# EAGLE board quantum_AnalougeEngine_V5_2 (EAGLE 9.6.2), part 1 of 2
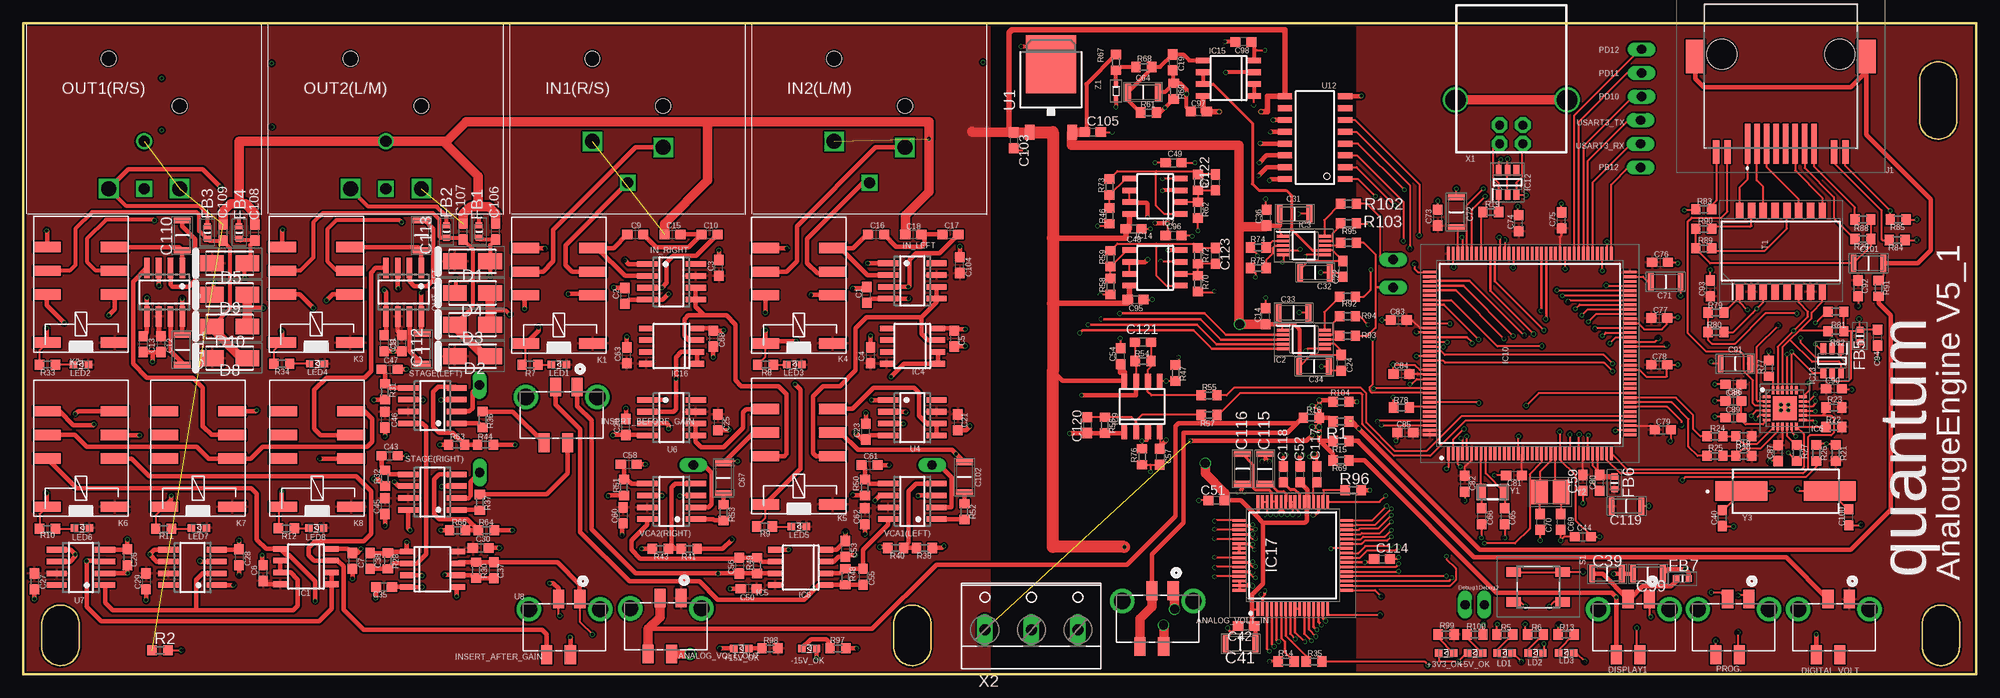
[diagram p0: board, top side]
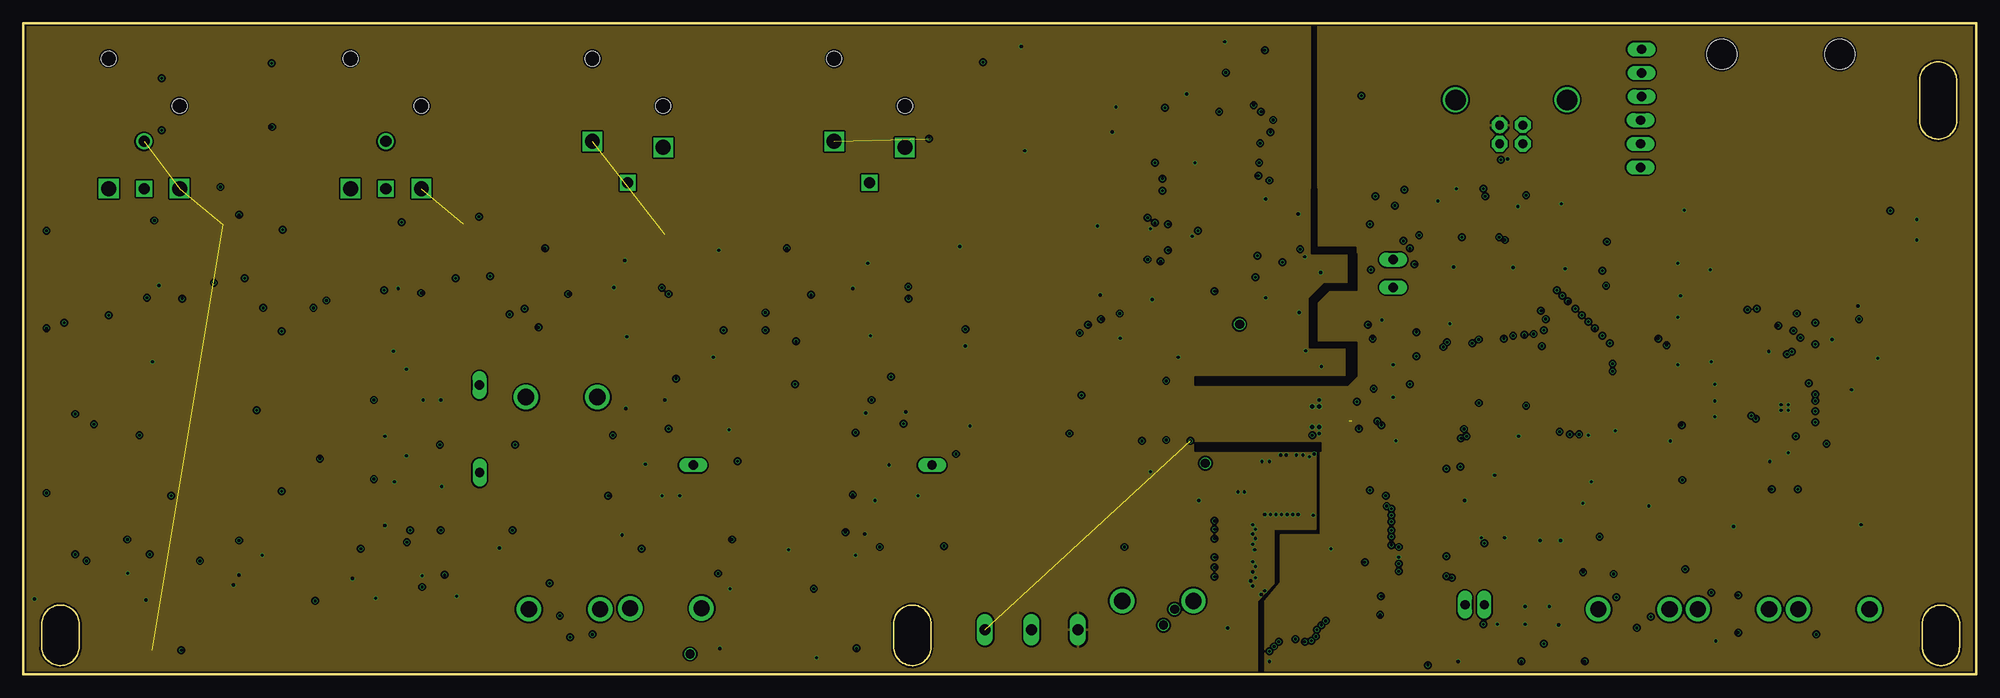
[diagram p1: board, inner layer midTop(AGND)]
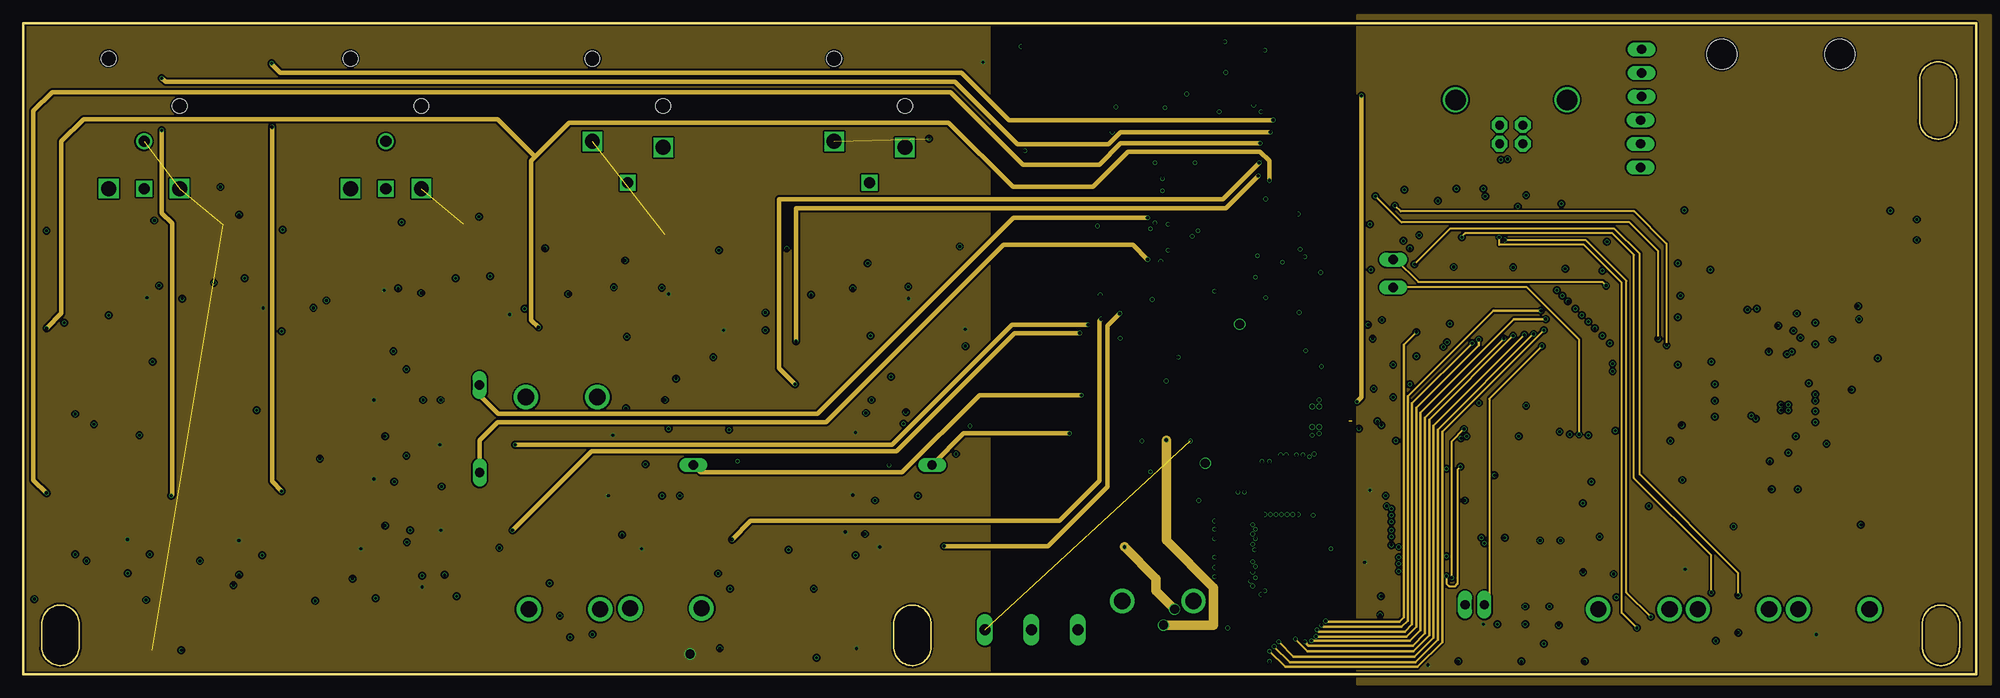
[diagram p2: board, inner layer midBottom(V-/+5V)]
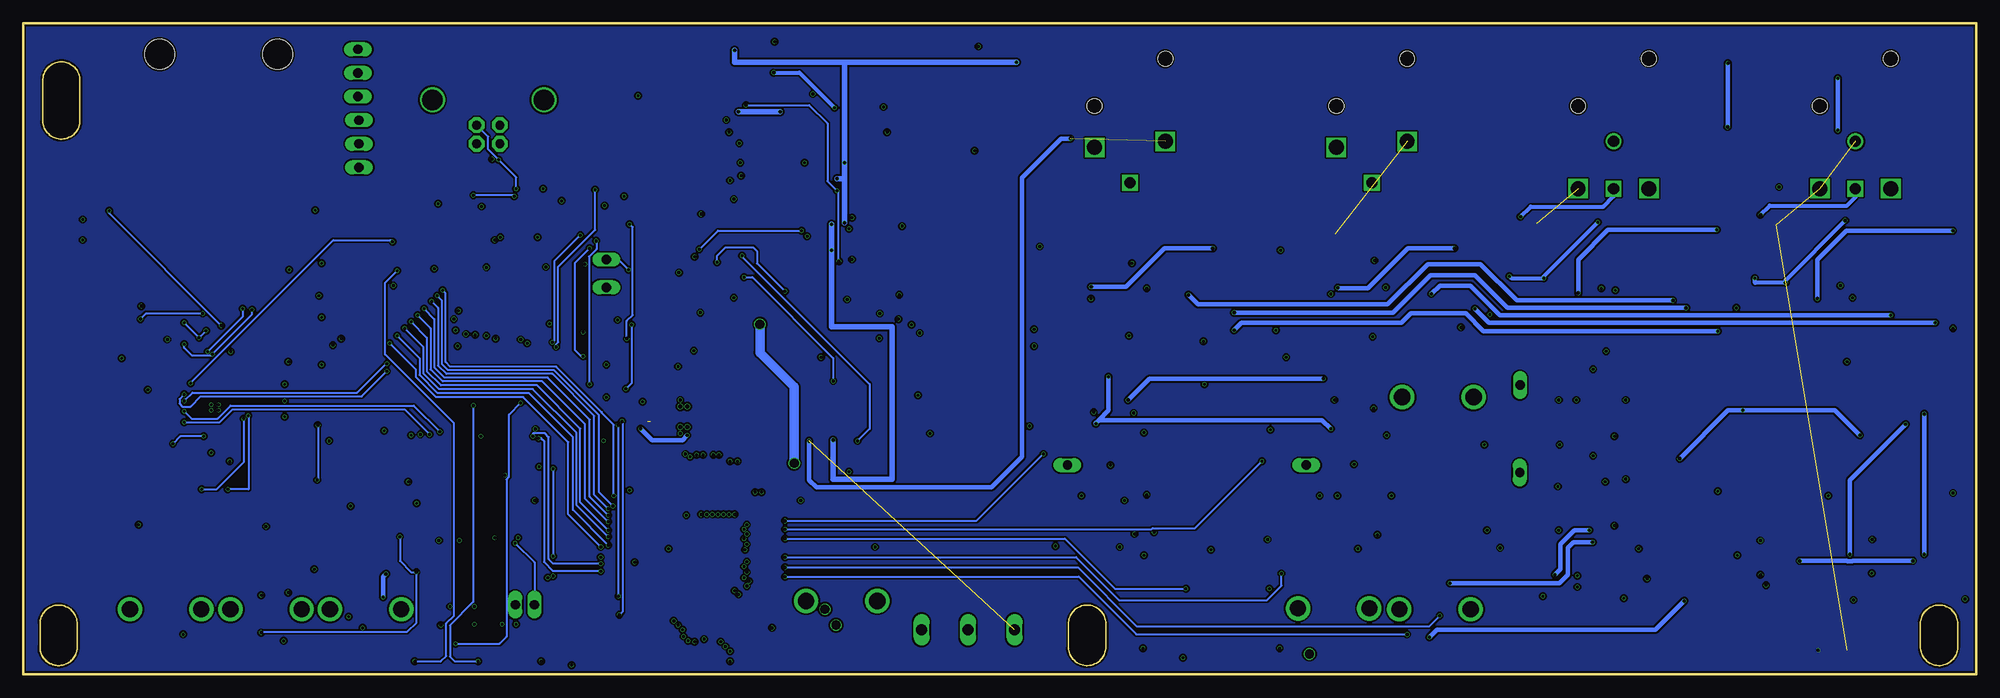
[diagram p3: board, bottom side, seen from below]

Size 210 x 70 mm. Coordinates in mm from the lower left corner, seen from the top.
Outline: 204.2,3 arc180 208.2,2.9
Outline: 0,0 210,0 210,70 0,70 0,0
Outline: 203.9,64 arc-171 207.9,64 207.9,59.5 arc-180 203.9,59.6 203.9,64
Outline: 6,5.6 arc171 2,5.6 2,2.9 arc180 6,3 6,5.6
Outline: 208.2,5.6 arc171 204.2,5.6 204.2,2.9 arc180 208.2,3 208.2,5.6
Outline: 93.6,5.6 arc-171 97.6,5.6 97.6,2.9 arc-180 93.6,3 93.6,5.6
Copper layers (1*2+15*16): Top(V+/+3V3) 0.018mm / dielectric 0.362mm / midTop(AGND) 0.035mm / dielectric 0.71mm / midBottom(V-/+5V) 0.035mm / dielectric 0.362mm / Bottom 0.018mm
Design rules "4layer": minimum track width 0.2mm, minimum drill 0.2mm, track to track 0.2mm, track to pad 0.1mm, pad to pad 0.1mm, via to via 0.1mm, smd to smd 0.1mm, copper to edge 0.2mm, drill to drill 0.21mm, minimum pad ring 0.25mm, minimum via ring 0.05mm, stop-mask expansion 0.01mm, vias tented up to drill 0mil, thermal gap 10mil

## Footprints (pad centres in the part's own frame; a part is rotated, then mirrored left to right if it is on the bottom)
WL-SMCW_0603 = smd 0.8 x 0.8: 1 -0.8,0; 2 0.8,0
MOLEX_90814-0204 = smd 1.194 x 2.007: 1 0.254,0; 2 1.27,5.994; 3 2.54,0; 4 3.81,5.994 | drill 1.753 pad 2.629: 5 -1.93,1.092; 6 5.74,1.092
C0603 = smd 1.1 x 1: 1 -0.85,0; 2 0.85,0
C1206 = smd 0.62 x 1.82: 1 -1.6,0; 2 1.6,0
DIONM5025X231N = smd 2.55 x 1.7: 1 -1.9,0; 2 1.9,0
THT_PIN = drill 1 long: P$1 0,0
BLM18KG102SH1J = smd 0.65 x 0.7: 1 -0.675,0; 2 0.675,0
SOIC8 = smd 0.6 x 1.5: 1 -1.905,-2.75; 2 -0.635,-2.75; 3 0.635,-2.75; 4 1.905,-2.75; 5 1.905,2.75; 6 0.635,2.75; 7 -0.635,2.75; 8 -1.905,2.75
SOP50P490X110-10N = smd 1.4 x 0.3: 1 -2.2,1; 2 -2.2,0.5; 3 -2.2,0; 4 -2.2,-0.5; 5 -2.2,-1; 6 2.2,-1; 7 2.2,-0.5; 8 2.2,0; 9 2.2,0.5; 10 2.2,1
QFN50P400X400X100-25N = smd 0.85 x 0.3: 1 -1.95,1.25; 2 -1.95,0.75; 3 -1.95,0.25; 4 -1.95,-0.25; 5 -1.95,-0.75; 6 -1.95,-1.25; 13 1.95,-1.25; 14 1.95,-0.75; 15 1.95,-0.25; 16 1.95,0.25; 17 1.95,0.75; 18 1.95,1.25 | smd 0.3 x 0.85: 7 -1.25,-1.95; 8 -0.75,-1.95; 9 -0.25,-1.95; 10 0.25,-1.95; 11 0.75,-1.95; 12 1.25,-1.95; 19 1.25,1.95; 20 0.75,1.95; 21 0.25,1.95; 22 -0.25,1.95; 23 -0.75,1.95; 24 -1.25,1.95 | smd 2.6 x 2.6: 25 0,0
QFP50P2200X2200X160-144N = smd 1.475 x 0.3: 1 -10.738,8.75; 2 -10.738,8.25; 3 -10.738,7.75; 4 -10.738,7.25; 5 -10.738,6.75; 6 -10.738,6.25; 7 -10.738,5.75; 8 -10.738,5.25; 9 -10.738,4.75; 10 -10.738,4.25; 11 -10.738,3.75; 12 -10.738,3.25; 13 -10.738,2.75; 14 -10.738,2.25; 15 -10.738,1.75; 16 -10.738,1.25; 17 -10.738,0.75; 18 -10.738,0.25; 19 -10.738,-0.25; 20 -10.738,-0.75; 21 -10.738,-1.25; 22 -10.738,-1.75; 23 -10.738,-2.25; 24 -10.738,-2.75; 25 -10.738,-3.25; 26 -10.738,-3.75; 27 -10.738,-4.25; 28 -10.738,-4.75; 29 -10.738,-5.25; 30 -10.738,-5.75; 31 -10.738,-6.25; 32 -10.738,-6.75; 33 -10.738,-7.25; 34 -10.738,-7.75; 35 -10.738,-8.25; 36 -10.738,-8.75; 73 10.738,-8.75; 74 10.738,-8.25; 75 10.738,-7.75; 76 10.738,-7.25; 77 10.738,-6.75; 78 10.738,-6.25; 79 10.738,-5.75; 80 10.738,-5.25; 81 10.738,-4.75; 82 10.738,-4.25; 83 10.738,-3.75; 84 10.738,-3.25; 85 10.738,-2.75; 86 10.738,-2.25; 87 10.738,-1.75; 88 10.738,-1.25; 89 10.738,-0.75; 90 10.738,-0.25; 91 10.738,0.25; 92 10.738,0.75; 93 10.738,1.25; 94 10.738,1.75; 95 10.738,2.25; 96 10.738,2.75; 97 10.738,3.25; 98 10.738,3.75; 99 10.738,4.25; 100 10.738,4.75; 101 10.738,5.25; 102 10.738,5.75; 103 10.738,6.25; 104 10.738,6.75; 105 10.738,7.25; 106 10.738,7.75; 107 10.738,8.25; 108 10.738,8.75 | smd 0.3 x 1.475: 37 -8.75,-10.738; 38 -8.25,-10.738; 39 -7.75,-10.738; 40 -7.25,-10.738; 41 -6.75,-10.738; 42 -6.25,-10.738; 43 -5.75,-10.738; 44 -5.25,-10.738; 45 -4.75,-10.738; 46 -4.25,-10.738; 47 -3.75,-10.738; 48 -3.25,-10.738; 49 -2.75,-10.738; 50 -2.25,-10.738; 51 -1.75,-10.738; 52 -1.25,-10.738; 53 -0.75,-10.738; 54 -0.25,-10.738; 55 0.25,-10.738; 56 0.75,-10.738; 57 1.25,-10.738; 58 1.75,-10.738; 59 2.25,-10.738; 60 2.75,-10.738; 61 3.25,-10.738; 62 3.75,-10.738; 63 4.25,-10.738; 64 4.75,-10.738; 65 5.25,-10.738; 66 5.75,-10.738; 67 6.25,-10.738; 68 6.75,-10.738; 69 7.25,-10.738; 70 7.75,-10.738; 71 8.25,-10.738; 72 8.75,-10.738; 109 8.75,10.738; 110 8.25,10.738; 111 7.75,10.738; 112 7.25,10.738; 113 6.75,10.738; 114 6.25,10.738; 115 5.75,10.738; 116 5.25,10.738; 117 4.75,10.738; 118 4.25,10.738; 119 3.75,10.738; 120 3.25,10.738; 121 2.75,10.738; 122 2.25,10.738; 123 1.75,10.738; 124 1.25,10.738; 125 0.75,10.738; 126 0.25,10.738; 127 -0.25,10.738; 128 -0.75,10.738; 129 -1.25,10.738; 130 -1.75,10.738; 131 -2.25,10.738; 132 -2.75,10.738; 133 -3.25,10.738; 134 -3.75,10.738; 135 -4.25,10.738; 136 -4.75,10.738; 137 -5.25,10.738; 138 -5.75,10.738; 139 -6.25,10.738; 140 -6.75,10.738; 141 -7.25,10.738; 142 -7.75,10.738; 143 -8.25,10.738; 144 -8.75,10.738
SOT95P280X145-6N = smd 1.15 x 0.6: 1 -1.3,0.95; 2 -1.3,0; 3 -1.3,-0.95; 4 1.3,-0.95; 5 1.3,0; 6 1.3,0.95
QFP50P1200X1200X160-64N = smd 1.475 x 0.3: 1 -5.738,3.75; 2 -5.738,3.25; 3 -5.738,2.75; 4 -5.738,2.25; 5 -5.738,1.75; 6 -5.738,1.25; 7 -5.738,0.75; 8 -5.738,0.25; 9 -5.738,-0.25; 10 -5.738,-0.75; 11 -5.738,-1.25; 12 -5.738,-1.75; 13 -5.738,-2.25; 14 -5.738,-2.75; 15 -5.738,-3.25; 16 -5.738,-3.75; 33 5.738,-3.75; 34 5.738,-3.25; 35 5.738,-2.75; 36 5.738,-2.25; 37 5.738,-1.75; 38 5.738,-1.25; 39 5.738,-0.75; 40 5.738,-0.25; 41 5.738,0.25; 42 5.738,0.75; 43 5.738,1.25; 44 5.738,1.75; 45 5.738,2.25; 46 5.738,2.75; 47 5.738,3.25; 48 5.738,3.75 | smd 0.3 x 1.475: 17 -3.75,-5.738; 18 -3.25,-5.738; 19 -2.75,-5.738; 20 -2.25,-5.738; 21 -1.75,-5.738; 22 -1.25,-5.738; 23 -0.75,-5.738; 24 -0.25,-5.738; 25 0.25,-5.738; 26 0.75,-5.738; 27 1.25,-5.738; 28 1.75,-5.738; 29 2.25,-5.738; 30 2.75,-5.738; 31 3.25,-5.738; 32 3.75,-5.738; 49 3.75,5.738; 50 3.25,5.738; 51 2.75,5.738; 52 2.25,5.738; 53 1.75,5.738; 54 1.25,5.738; 55 0.75,5.738; 56 0.25,5.738; 57 -0.25,5.738; 58 -0.75,5.738; 59 -1.25,5.738; 60 -1.75,5.738; 61 -2.25,5.738; 62 -2.75,5.738; 63 -3.25,5.738; 64 -3.75,5.738
NEUTRIK_NC3FAH = drill 1.6 square: 1 -3.81,-12.7; 2 3.81,-13.335 | drill 1.2 square: 3 0,-17.15 | hole 1.6: -3.81,-3.81; 3.81,-8.89
SO08 = smd 0.6 x 2.2: 1 -1.905,-2.6; 2 -0.635,-2.6; 3 0.635,-2.6; 4 1.905,-2.6; 5 1.905,2.6; 6 0.635,2.6; 7 -0.635,2.6; 8 -1.905,2.6
GWLEXSMTS988GY = smd 0.61 x 4.3: 1 3.57,7.05; 2 2.55,7.05; 3 1.53,7.05; 4 0.51,7.05; 5 -0.51,7.05; 6 -1.53,7.05; 7 -2.55,7.05; 8 -3.57,7.05 | smd 0.7 x 2.5: 9 6.95,7.95; 10 5.74,7.95; 11 -5.74,7.95; 12 -6.95,7.95 | smd 2.032 x 3.6: MP1 -9.204,-2.3; MP2 9.204,-2.3 | hole 3.25: -6.35,-2.55; 6.35,-2.55
351 = smd 1.11 x 3: 1 -2.623,-3.645; 2 -2.623,3.645; P1 5.096,-3.645; P2 5.096,3.645; Q1 2.556,-3.645; Q2 2.556,3.645; S1 7.636,-3.645; S2 7.636,3.645
NEUTRIK_NC3MAH = drill 1.6 square: 1 3.81,-17.78; 2 -3.81,-17.78 | drill 1.2 square: 3 0,-17.78 | drill 1.2: G 0,-12.7 | hole 1.6: -3.81,-3.8; 3.81,-8.89
R0603 = smd 1 x 1.1: 1 -0.85,0; 2 0.85,0
PTS647SN50SMTR2LFS = smd 1.55 x 1: 1 -2.625,-1.6; 2 2.625,-1.6; 3 2.625,1.6; 4 -2.625,1.6
SOIC127P940X597-16N = smd 1.645 x 0.8: 1 -4.378,4.445; 2 -4.378,3.175; 3 -4.378,1.905; 4 -4.378,0.635; 5 -4.378,-0.635; 6 -4.378,-1.905; 7 -4.378,-3.175; 8 -4.378,-4.445; 9 4.378,-4.445; 10 4.378,-3.175; 11 4.378,-1.905; 12 4.378,-0.635; 13 4.378,0.635; 14 4.378,1.905; 15 4.378,3.175; 16 4.378,4.445
TO252 = smd 1 x 1.6: 1 -2.28,-4.8; 3 2.28,-4.8 | smd 5.4 x 6.2: 2 0,2.5
SOIC16 = smd 1.524 x 0.635: 1 -3.24,4.445; 2 -3.24,3.175; 3 -3.24,1.905; 4 -3.24,0.635; 5 -3.24,-0.635; 6 -3.24,-1.905; 7 -3.24,-3.175; 8 -3.24,-4.445; 9 3.24,-4.445; 10 3.24,-3.175; 11 3.24,-1.905; 12 3.24,-0.635; 13 3.24,0.635; 14 3.24,1.905; 15 3.24,3.175; 16 3.24,4.445
SMARTPRJ_PN61729 = drill 0.95 pad 1.676 octagon: 1 1.25,4.71; 2 -1.25,4.71; 3 -1.25,2.71; 4 1.25,2.71 | drill 2.2: P$1 -6,0; P$2 6,0
W237-103 = drill 1.194 long: 1 -5,-1.29; 2 0,-1.29; 3 5,-1.29
NX3215SA = smd 1 x 1.8: 1 -1.25,0; 2 1.25,0
RESC3226X100N = smd 1.75 x 2.65: 1 -1.15,0; 2 1.15,0
ABLS = smd 5.6 x 2.1: 1 -4.75,0; 2 4.75,0
SODFL1608X65N = smd 0.57 x 0.42: 1 -0.775,0; 2 0.775,0

## Placement (x,y rotation side)
+3V3_OK  LED_GREEN_SMD  [WL-SMCW_0603]  153,2.3 0 top
+5V_OK  LED_GREEN_SMD  [WL-SMCW_0603]  156.1,2.3 0 top
+15V_OK  LED_GREEN_SMD  [WL-SMCW_0603]  77.2,2.8 0 top
-15V_OK  LED_GREEN_SMD  [WL-SMCW_0603]  84.5,2.8 0 top
ANALOG_VOLT_IN  90814-0204  [MOLEX_90814-0204]  123.9,9 180 top
ANALOG_VOLT_OUT  90814-0204  [MOLEX_90814-0204]  71,8.2 180 top
C1  100 nF  [C0603]  90.7,40.8 90 top
C2  100 nF  [C0603]  64.7,40.7 90 top
C3  100 nF  [C0603]  74.8,43.7 90 top
C4  100 nF  [C0603]  91.1,34.3 90 top
C5  100 nF  [C0603]  100.1,36.1 270 top
C6  100 nF  [C0603]  25.8,10.9 90 top
C7  100 nF  [C0603]  35.4,12.2 270 top
C8  100 nF  [C0603]  40.7,35.6 270 top
C9  470 pF  [C0603]  65.8,47.3 0 top
C10  470 pF  [C0603]  73.8,47.3 0 top
C11  100 nF  [C0603]  38.8,35.6 270 top
C12  100 nF  [C0603]  14.8,35.5 270 top
C13  100 nF  [C0603]  12.9,35.5 270 top
C14  100 nF  [C0603]  133.6,38.5 90 top
C15  47 pF  [C0603]  69.8,47.3 0 top
C16  470 pF  [C0603]  91.7,47.3 0 top
C17  470 pF  [C0603]  99.7,47.3 0 top
C18  47 pF  [C0603]  95.7,47.3 0 top
C19  100 nF  [C0603]  123.6,65.8 270 top
C20  100 nF  [C0603]  64.8,26.6 90 top
C21  100 nF  [C0603]  100.5,27.1 270 top
C22  100 nF  [C0603]  141.9,43.6 270 top
C23  100 nF  [C0603]  90.6,26.1 90 top
C24  100 nF  [C0603]  141.7,33.5 270 top
C25  100 nF  [C0603]  74.7,27.1 270 top
C26  100 nF  [C0603]  11.2,12.6 270 top
C27  100 nF  [C0603]  1.2,10 270 top
C28  100 nF  [C0603]  23.2,12.6 270 top
C29  100 nF  [C0603]  13.2,10 270 top
C30  100 nF  [C0603]  49.2,13.6 0 top
C31  10 uF  [C1206]  136.7,49.5 0 top
C32  10 uF  [C1206]  138.9,43.2 0 top
C33  10 uF  [C1206]  136.6,38.9 0 top
C34  10 uF  [C1206]  138.8,33.1 0 top
C35  100 nF  [C0603]  38.8,9.4 180 top
C36  100 nF  [C0603]  133.7,49.1 90 top
C37  22 pF  [C0603]  50.6,11.2 90 top
C38  22 pF  [C0603]  37.3,12.2 90 top
C39  10 uF  [C1206]  170.3,10.8 0 top
C40  30 pF  [C0603]  182.7,16.8 90 top
C41  10 uF  [C1206]  130.9,3.3 180 top
C42  100 nF  [C0603]  131.5,5.2 180 top
C43  100 nF  [C0603]  39.4,23.5 0 top
C44  100 nF  [C0603]  167.7,14.8 0 top
C45  100 nF  [C0603]  38.9,18.1 270 top
C46  100 nF  [C0603]  38.9,27.4 270 top
C47  100 nF  [C0603]  39.4,32.8 0 top
C48  100 nF  [C0603]  119.4,47.9 0 top
C49  100 nF  [C0603]  123.7,55 0 top
C50  100 nF  [C0603]  78,9.2 180 top
C51  100 nF  [C0603]  128.3,18.7 180 top
C52  100 nF  [C0603]  137.3,21.5 90 top
C53  100 nF  [C0603]  88.4,13.5 270 top
C54  100 nF  [C0603]  118,34.2 90 top
C55  22 pF  [C0603]  90.3,10.5 270 top
C56  22 pF  [C0603]  77,11.7 270 top
C57  100 nF  [C0603]  122.2,23.4 270 top
C58  100 nF  [C0603]  65.1,22.6 0 top
C59  100 nF  [C0603]  167.7,20.6 90 top
C60  100 nF  [C0603]  64.5,17.1 270 top
C61  100 nF  [C0603]  91,22.5 0 top
C62  100 nF  [C0603]  90.5,17 270 top
C63  100 nF  [C0603]  64.9,34.3 90 top
C64  10 uF  [C1206]  120.4,62.6 0 top
C65  2.7 pF  [C0603]  159.3,17 270 top
C66  2.7 pF  [C0603]  156.8,17 270 top
C67  10 uF  [C1206]  75.3,21.1 270 top
C68  100 nF  [C0603]  74.2,36.1 270 top
C69  4.3 pF  [C0603]  165.3,16.4 270 top
C70  4.3 pF  [C0603]  163.1,16.4 270 top
C71  2.2 uF  [C1206]  176.6,42.2 0 top
C72  2.2 uF  [C1206]  154.1,49.7 90 top
C73  100 nF  [C0603]  152.1,49.1 90 top
C74  100 nF  [C0603]  160.8,48.5 90 top
C75  100 nF  [C0603]  165.4,48.8 90 top
C76  100 nF  [C0603]  176,44.3 0 top
C77  100 nF  [C0603]  175.9,38.3 0 top
C78  100 nF  [C0603]  175.9,33.3 0 top
C79  100 nF  [C0603]  176.3,26.3 0 top
C80  100 nF  [C0603]  169.5,20.6 90 top
C81  100 nF  [C0603]  160.3,21.4 0 top
C82  100 nF  [C0603]  155,20.5 90 top
C83  100 nF  [C0603]  147.9,38.1 180 top
C84  100 nF  [C0603]  148.2,32.3 180 top
C85  100 nF  [C0603]  148.6,26 180 top
C86  100 nF  [C0603]  183.9,31.2 0 top
C87  100 nF  [C0603]  188.7,23.8 90 top
C88  1 uF  [C0603]  183.9,29.4 0 top
C89  470 pF  [C0603]  183.9,27.6 0 top
C90  100 nF  [C0603]  194.7,30.7 180 top
C91  10 uF  [C1206]  184.1,33.4 180 top
C92  100 nF  [C0603]  197.3,41.5 90 top
C93  100 nF  [C0603]  181.4,41.5 270 top
C94  100 nF  [C0603]  199.4,36.2 90 top
C95  100 nF  [C0603]  119.6,40.3 0 top
C96  100 nF  [C0603]  123.7,47.2 0 top
C97  100 nF  [C0603]  126.4,60.5 180 top
C98  100 nF  [C0603]  131.2,68 180 top
C99  10 uF  [C1206]  174.7,10.8 180 top
C100  30 pF  [C0603]  196.3,16.9 90 top
C101  4.7 uF  [C1206]  198.4,44.2 0 top
C102  10 uF  [C1206]  101.2,21.2 270 top
C103  330 nF  [C0603]  106.5,57.4 270 top
C104  100 nF  [C0603]  100.7,44 90 top
C105  100 nF  [C0603]  115,58.3 0 top
C106  100 nF  [C0603]  50.8,47.6 90 top
C107  100 nF  [C0603]  47.3,47.6 90 top
C108  100 nF  [C0603]  24.9,47.5 90 top
C109  100 nF  [C0603]  21.5,47.5 90 top
C110  10 uF  [C1206]  17.1,47.2 270 top
C111  10 uF  [C1206]  17.1,34.9 90 top
C112  10 uF  [C1206]  42.9,35 90 top
C113  10 uF  [C1206]  42.8,47.2 270 top
C114  100 nF  [C0603]  146.1,12.4 0 top
C115  10 uF  [C1206]  133.5,22.1 90 top
C116  10 uF  [C1206]  131.1,22.1 270 top
C117  1 uF  [C0603]  139.1,21.5 90 top
C118  1 uF  [C0603]  135.5,21.5 90 top
C119  4.7 uF  [C1206]  172.4,18.1 180 top
C120  22 pF  [C0603]  114.4,26.8 270 top
C121  22 pF  [C0603]  120.4,35.7 180 top
C122  22 pF  [C0603]  128.2,52.9 90 top
C123  22 pF  [C0603]  128.2,45 90 top
D1  FM4004-W  [DIONM5025X231N]  48.3,44.4 0 top
D2  FM4004-W  [DIONM5025X231N]  48.3,34.2 0 top
D3  FM4004-W  [DIONM5025X231N]  48.3,37.6 0 top
D4  FM4004-W  [DIONM5025X231N]  48.3,41 0 top
D5  FM4004-W  [DIONM5025X231N]  22.2,44.2 0 top
D8  FM4004-W  [DIONM5025X231N]  22.2,34 0 top
D9  FM4004-W  [DIONM5025X231N]  22.2,40.8 0 top
D10  FM4004-W  [DIONM5025X231N]  22.2,37.4 0 top
DEBUG1  TPTHT  [THT_PIN]  155.04,7.5 90 top
DEBUG2  TPTHT  [THT_PIN]  157.1,7.5 90 top
DIGITAL_VOLT  90814-0204  [MOLEX_90814-0204]  196.6,8.1 180 top
DISPLAY1  90814-0204  [MOLEX_90814-0204]  175.1,8.1 180 top
FB1  FERITTE-BREAD  [BLM18KG102SH1J]  49,47.6 90 top
FB2  FERITTE-BREAD  [BLM18KG102SH1J]  45.5,47.6 90 top
FB3  FERITTE-BREAD  [BLM18KG102SH1J]  19.8,47.5 90 top
FB4  FERITTE-BREAD  [BLM18KG102SH1J]  23.2,47.5 90 top
FB5  0 R  [BLM18KG102SH1J]  197.5,36.4 90 top
FB6  FERITTE-BREAD  [BLM18KG102SH1J]  171.1,20.6 90 top
FB7  FERITTE-BREAD  [BLM18KG102SH1J]  178.4,10.3 0 top
IC1  OP275  [SOIC8]  30.4,11.6 90 top
IC2  DAC084S085CIMM_NOPB  [SOP50P490X110-10N]  137.7,36 0 top
IC3  DAC084S085CIMM_NOPB  [SOP50P490X110-10N]  137.7,46.1 0 top
IC4  OP275  [SOIC8]  95.6,35.3 90 top
IC5  OP275  [SOIC8]  44,11.3 270 top
IC6  LAN8742A-CZ-TR  [QFN50P400X400X100-25N]  189.4,28.6 0 top
IC7  NE5532  [SOIC8]  121.7,51.4 90 top
IC8  OP275  [SOIC8]  83.6,11.5 90 top
IC9  NE5532  [SOIC8]  120.3,28.8 0 top
IC10  STM32F767ZIT6  [QFP50P2200X2200X160-144N]  162,34.5 90 top
IC12  ESDA6V1BC6  [SOT95P280X145-6N]  159.6,52.9 90 top
IC13  USBLC6-4SC6  [SOT95P280X145-6N]  194.5,33.7 270 top
IC14  NE5532  [SOIC8]  121.7,43.7 90 top
IC15  NE5532  [SOIC8]  129.6,64.1 90 top
IC16  OP275  [SOIC8]  69.7,35.3 90 top
IC17  AD7606BSTZ-6  [QFP50P1200X1200X160-64N]  136.5,12.8 90 top
IN1(R/S)  NEUTRIK_NC3FAH  [NEUTRIK_NC3FAH]  65,70 0 top
IN2(L/M)  NEUTRIK_NC3FAH  [NEUTRIK_NC3FAH]  91,70 0 top
IN_LEFT  THAT1240  [SO08]  95.6,42.3 270 top
IN_RIGHT  THAT1240  [SO08]  69.7,42.2 270 top
INSERT_AFTER_GAIN  90814-0204  [MOLEX_90814-0204]  60.1,8.1 180 top
INSERT_BEFORE_GAIN  90814-0204  [MOLEX_90814-0204]  59.8,30.9 180 top
J1  GWLEX-SMT-S988G_Y  [GWLEXSMTS988GY]  188.99,64.11 180 top
K1  Relay  [351]  57.6,38.2 90 top
K2  Relay  [351]  6.2,38.3 90 top
K3  Relay  [351]  31.5,38.3 90 top
K4  Relay  [351]  83.4,38.2 90 top
K5  Relay  [351]  83.4,20.9 90 top
K6  Relay  [351]  6.2,20.65 90 top
K7  Relay  [351]  18.8,20.65 90 top
K8  Relay  [351]  31.6,20.65 90 top
LD1  LED_YELOW_SMD  [WL-SMCW_0603]  159.3,2.3 0 top
LD2  LED_RED_SMD  [WL-SMCW_0603]  162.6,2.3 0 top
LD3  LED_GREEN_SMD  [WL-SMCW_0603]  165.9,2.3 0 top
LED1  LED_BLUE_SMD  [WL-SMCW_0603]  57.6,33.3 0 top
LED2  LED_BLUE_SMD  [WL-SMCW_0603]  6.2,33.3 0 top
LED3  LED_BLUE_SMD  [WL-SMCW_0603]  82.9,33.3 0 top
LED4  LED_BLUE_SMD  [WL-SMCW_0603]  31.6,33.4 0 top
LED5  LED_BLUE_SMD  [WL-SMCW_0603]  83.4,15.9 0 top
LED6  LED_BLUE_SMD  [WL-SMCW_0603]  6.3,15.75 0 top
LED7  LED_BLUE_SMD  [WL-SMCW_0603]  18.9,15.75 0 top
LED8  LED_BLUE_SMD  [WL-SMCW_0603]  31.5,15.75 0 top
OUT1(R/S)  NEUTRIK_NC3MAH  [NEUTRIK_NC3MAH]  13,70 0 top
OUT2(L/M)  NEUTRIK_NC3MAH  [NEUTRIK_NC3MAH]  39,70 0 top
OUT_LEFT  THAT1646  [SO08]  40.9,41.1 180 top
OUT_RIGHT  THAT1646  [SO08]  15.2,41.1 180 top
PROG.  90814-0204  [MOLEX_90814-0204]  185.8,8.1 180 top
R1  0 R  [R0603]  141.7,27.2 180 top
R2  0 R  [R0603]  14.7,2.6 0 top
R5  680 R  [R0603]  159.3,4.3 0 top
R6  680 R  [R0603]  162.6,4.3 0 top
R7  680 R  [R0603]  54.5,33.3 0 top
R8  680 R  [R0603]  79.8,33.3 0 top
R9  680 R  [R0603]  79.7,15.9 0 top
R10  680 R  [R0603]  2.6,15.65 0 top
R11  680 R  [R0603]  15.1,15.65 0 top
R12  680 R  [R0603]  28.3,15.7 0 top
R13  680 R  [R0603]  165.9,4.3 0 top
R14  10 k  [R0603]  135.8,1.4 180 top
R15  0 R  [R0603]  141.7,25.1 180 top
R16  0 R  [R0603]  138.5,27.6 0 top
R18  10 k  [R0603]  185,25.6 180 top
R19  10 k  [R0603]  157.8,49.7 0 top
R20  10 k  [R0603]  185,23.5 180 top
R21  10 k  [R0603]  194.9,23.8 90 top
R22  1k5  [R0603]  194.7,26.6 180 top
R23  10 k  [R0603]  194.7,28.7 0 top
R24  33 R  [R0603]  181.9,25.6 0 top
R25  33 R  [R0603]  181.9,23.5 0 top
R26  33 R  [R0603]  192.8,23.8 90 top
R27  10 k  [R0603]  190.7,23.8 90 top
R28  20 k  [R0603]  39.2,12.2 90 top
R29  75 R  [R0603]  197.8,46.8 180 top
R30  20 k  [R0603]  48.7,11.2 90 top
R31  5k1  [R0603]  38.9,30.4 90 top
R32  5k1  [R0603]  38.9,21.1 90 top
R33  680 R  [R0603]  2.6,33.3 0 top
R34  680 R  [R0603]  27.8,33.4 0 top
R35  10 k  [R0603]  138.8,1.4 0 top
R36  20 k  [R0603]  49.4,27.4 270 top
R37  20 k  [R0603]  49.1,18.5 270 top
R38  27 k  [R0603]  96.9,13.6 0 top
R40  160 k  [R0603]  93.8,13.6 0 top
R41  27 k  [R0603]  71.6,13.5 0 top
R43  160 k  [R0603]  68.5,13.5 0 top
R44  27 k  [R0603]  49.7,24.7 0 top
R46  10 k  [R0603]  116.8,49.3 90 top
R47  1k8  [R0603]  123.9,32.4 270 top
R48  20 k  [R0603]  88.4,10.5 270 top
R49  20 k  [R0603]  78.9,11.7 270 top
R50  5k1  [R0603]  90.5,20.1 90 top
R51  5k1  [R0603]  64.6,20.1 90 top
R52  20 k  [R0603]  101.2,17.5 270 top
R53  20 k  [R0603]  75.3,17.4 270 top
R54  10 k  [R0603]  120.4,33.7 180 top
R55  10 k  [R0603]  127.5,30 180 top
R56  10 k  [R0603]  116.3,26.8 270 top
R57  10 k  [R0603]  127.5,27.9 180 top
R58  10 k  [R0603]  116.9,41.7 90 top
R59  56 k  [R0603]  116.9,44.7 90 top
R60  10 k  [R0603]  123.7,62.7 270 top
R61  10 k  [R0603]  121,60.4 180 top
R62  10 k  [R0603]  126.3,49.9 90 top
R63  160 k  [R0603]  46.6,24.7 0 top
R64  27 k  [R0603]  49.8,15.5 0 top
R66  160 k  [R0603]  46.7,15.5 0 top
R67  10 k  [R0603]  117.5,65.8 90 top
R68  20 k  [R0603]  120.5,65.3 180 top
R69  0 R  [R0603]  141.7,23 180 top
R70  10 k  [R0603]  126.3,42 90 top
R71  10 k  [R0603]  126.3,52.9 90 top
R72  10 k  [R0603]  126.3,45 90 top
R73  56 k  [R0603]  116.8,52.4 90 top
R74  10 k  [R0603]  132.8,45.9 180 top
R75  10 k  [R0603]  132.8,43.7 180 top
R76  1k8  [R0603]  120.3,23.4 90 top
R77  12k1  [R0603]  187.7,32.9 90 top
R78  10 k  [R0603]  148.2,28.7 180 top
R79  50 R  [R0603]  182,38.9 180 top
R80  50 R  [R0603]  182,36.8 180 top
R81  50 R  [R0603]  194.9,39 0 top
R82  50 R  [R0603]  194.9,36.9 0 top
R83  270 R  [R0603]  180.7,50 0 top
R84  270 R  [R0603]  201.5,46.7 180 top
R85  10 k  [R0603]  201.6,48.9 180 top
R88  75 R  [R0603]  197.8,48.9 180 top
R89  75 R  [R0603]  180.7,45.8 0 top
R90  75 R  [R0603]  180.7,47.9 0 top
R91  0 R  [R0603]  199.5,41.5 90 top
R92  500 R  [R0603]  142.4,40.6 0 top
R93  500 R  [R0603]  142.4,36.4 0 top
R94  500 R  [R0603]  142.4,38.5 0 top
R95  500 R  [R0603]  142.5,48.5 0 top
R96  10 k  [R0603]  143,19.8 180 top
R97  680 R  [R0603]  87.6,2.8 180 top
R98  680 R  [R0603]  80.3,2.8 0 top
R99  65 R  [R0603]  153,4.3 0 top
R100  150 R  [R0603]  156.1,4.3 0 top
R102  500 R  [R0603]  142.5,50.6 0 top
R103  500 R  [R0603]  142.5,46.4 0 top
R104  0 R  [R0603]  141.7,29.3 180 top
S1  PTS647SN50SMTR2LFS  [PTS647SN50SMTR2LFS]  162.9,9.4 0 top
STAGE(LEFT)  THAT2181SO8-US  [SO08]  44,28.9 90 top
STAGE(RIGHT)  THAT2181SO8-US  [SO08]  44,19.6 90 top
T1  H1102NL  [SOIC127P940X597-16N]  189,45.5 90 top
TP01  TPTHT  [THT_PIN]  49.08,21.7 270 top
TP02  TPTHT  [THT_PIN]  49.06,31.1 270 top
TP03  TPTHT  [THT_PIN]  147.3,44.6 0 top
TP04  TPTHT  [THT_PIN]  147.3,41.6 0 top
TP05  TPTHT  [THT_PIN]  173.9,54.5 0 top
TP06  TPTHT  [THT_PIN]  173.9,57.04 0 top
TP07  TPTHT  [THT_PIN]  173.9,59.58 0 top
TP08  TPTHT  [THT_PIN]  174,62.12 0 top
TP09  TPTHT  [THT_PIN]  174,64.66 0 top
TP10  TPTHT  [THT_PIN]  174,67.2 0 top
TP36  TPTHT  [THT_PIN]  72.04,22.5 180 top
TP37  TPTHT  [THT_PIN]  97.72,22.5 180 top
U1  78*_SMD  [TO252]  110.5,63.1 0 top
U4  THAT1240  [SO08]  95.6,27.6 270 top
U6  THAT1240  [SO08]  69.7,27.6 270 top
U7  THAT1240  [SO08]  6.2,11.5 90 top
U8  THAT1240  [SO08]  18.2,11.5 90 top
U12  ULN2003  [SOIC16]  138.9,57.7 180 top
VCA1(LEFT)  THAT2181SO8-US  [SO08]  95.6,18.6 90 top
VCA2(RIGHT)  THAT2181SO8-US  [SO08]  69.7,18.6 90 top
X1  [SMARTPRJ_PN61729]  160,61.76 180 top
X2  [W237-103]  108.4,6.1 0 top
Y1  NX3215SA-32.768K-STD-MUA-8  [NX3215SA]  158,19.6 0 top
Y2  NX3225GD-8MHZ-STD-CRA-3  [RESC3226X100N]  164.2,19.6 0 top
Y3  ABLS2-25.000MHZ-D4YF-T  [ABLS]  189.5,19.7 0 top
Z1  ZENER_DIODE_BZT  [SODFL1608X65N]  117.5,62.7 270 top

## Library data of the parts
+3V3_OK +5V_OK +15V_OK -15V_OK LD1-LD3 LED1-LED8 = passive components; MOUSER_PART_NUMBER: ...
ANALOG_VOLT_IN ANALOG_VOLT_OUT DIGITAL_VOLT DISPLAY1 INSERT_AFTER_GAIN INSERT_BEFORE_GAIN PROG. = electro_mechanical; DESCRIPTION: CONN HEADER 4POS 1.27MM SMD TIN; HEIGHT: mm; MANUFACTURER_NAME: Molex; MANUFACTURER_PART_NUMBER: 90814-0204; MOUSER_PART_NUMBER: 538-90814-0204; MOUSER_PRICE-STOCK: https://www.mouser.com/Search/Refine.aspx?Keyword=538-90814-0204
C1-C123 R1 R2 R5-R16 R18-R38 R40 R41 R43 R44 R46-R64 R66-R85 R88-R100 R102-R104 U1 = passive components
D1-D5 D8-D10 = active components; DESCRIPTION: Rectifiers 1N4004 1A 400V; HEIGHT: 2.31mm; MANUFACTURER_NAME: Rectron; MANUFACTURER_PART_NUMBER: FM4004-W; MOUSER_PART_NUMBER: 583-FM4004; MOUSER_PRICE-STOCK: https://www.mouser.co.uk/ProductDetail/Rectron/FM4004-W?qs=Iw9Ubr57Px3IHNH1bE4l9w%3D%3D
DEBUG1 DEBUG2 IC1 IC4 IC5 IC7-IC9 IC14-IC16 IN1(R/S) IN2(L/M) K1-K4 K7 K8 OUT1(R/S) OUT2(L/M) TP01-TP09 TP10 TP36 TP37 U12 = C_Sager_Bibliothek
FB1-FB7 = passive components; DESCRIPTION: BLM18_H1D Series EMI Suppression Filter 1000+/-25% at 100MHz 1A @85; HEIGHT: 0.95mm; MANUFACTURER_NAME: Murata Electronics; MANUFACTURER_PART_NUMBER: BLM18KG102SH1D; MOUSER_PART_NUMBER: 81-BLM18KG102SH1D; MOUSER_PRICE-STOCK: https://www.mouser.co.uk/ProductDetail/Murata-Electronics/BLM18KG102SH1D?qs=0lQeLiL1qyYL39c9eT84hA%3D%3D
IC2 IC3 = SPI; MOUSER_PART_NUMBER: 926-DAC084S085CIMMNO
IC6 = NUCLEO_parts; DESCRIPTION: Ethernet ICs; HEIGHT: 1mm; MANUFACTURER_NAME: Microchip; MANUFACTURER_PART_NUMBER: LAN8742A-CZ-TR; MOUSER_PART_NUMBER: 579-LAN8742A-CZ-TR; MOUSER_PRICE-STOCK: https://www.mouser.com/Search/Refine.aspx?Keyword=579-LAN8742A-CZ-TR
IC10 = NUCLEO_parts; DESCRIPTION: STMICROELECTRONICS - STM32F767ZIT6 - MCU, 32BIT, CORTEX-M7, 216MHZ, LQFP-144; HEIGHT: 1.6mm; MANUFACTURER_NAME: STMicroelectronics; MANUFACTURER_PART_NUMBER: STM32F767ZIT6; MOUSER_PART_NUMBER: 511-STM32F767ZIT6; MOUSER_PRICE-STOCK: https://www.mouser.com/Search/Refine.aspx?Keyword=511-STM32F767ZIT6
IC12 = NUCLEO_parts; DESCRIPTION: TVS Diode Array Bi-Directional ESDA6V1BC6 Quad, 80W, SOT-23 6-Pin; HEIGHT: 1.45mm; MANUFACTURER_NAME: STMicroelectronics; MANUFACTURER_PART_NUMBER: ESDA6V1BC6; MOUSER_PART_NUMBER: 511-ESDA6V1BC6; MOUSER_PRICE-STOCK: https://www.mouser.com/Search/Refine.aspx?Keyword=511-ESDA6V1BC6
IC13 = NUCLEO_parts; DESCRIPTION: TVS Diode Array Uni-Directional USBLC6-4SC6 17V, SOT-23 6-Pin; HEIGHT: 1.45mm; MANUFACTURER_NAME: STMicroelectronics; MANUFACTURER_PART_NUMBER: USBLC6-4SC6; MOUSER_PART_NUMBER: 511-USBLC6-4SC6; MOUSER_PRICE-STOCK: https://www.mouser.com/Search/Refine.aspx?Keyword=511-USBLC6-4SC6
IC17 = AD-Converter; DESCRIPTION: Bipolar Input, Simultaneous Sampling ADC; HEIGHT: 1.6mm; MANUFACTURER_NAME: Analog Devices; MANUFACTURER_PART_NUMBER: AD7606BSTZ-6; MOUSER_PART_NUMBER: 584-AD7606BSTZ-6; MOUSER_PRICE-STOCK: https://www.mouser.co.uk/ProductDetail/Analog-Devices/AD7606BSTZ-6?qs=%2FtpEQrCGXCyHpSx4CO2TTQ%3D%3D
IN_LEFT IN_RIGHT U4 U6-U8 = THAT_Library; MOUSER_PART_NUMBER: 887-1240S08-U
J1 = electro_mechanical; DESCRIPTION: SMT MODULAR JACK; HEIGHT: 13.3mm; MANUFACTURER_NAME: Kycon; MANUFACTURER_PART_NUMBER: GWLEX-SMT-S988G/Y; MOUSER_PART_NUMBER: 806-GWLEX-SMT-S988GY; MOUSER_PRICE-STOCK: https://www.mouser.com/Search/Refine.aspx?Keyword=806-GWLEX-SMT-S988GY
K5 K6 = C_Sager_Bibliothek; SPICEPREFIX: B
OUT_LEFT OUT_RIGHT = THAT_Library; MOUSER_PART_NUMBER: 887-1646S08-U
S1 = NUCLEO_parts; DESCRIPTION: Tactile Switches 50mA 12VDC, 1.0N 5.0mm H, G leads; HEIGHT: 5mm; MANUFACTURER_NAME: C & K COMPONENTS; MANUFACTURER_PART_NUMBER: PTS647SN50SMTR2LFS; MOUSER_PART_NUMBER: 611-PTS647SN50SMTR2L; MOUSER_PRICE-STOCK: https://www.mouser.com/Search/Refine.aspx?Keyword=611-PTS647SN50SMTR2L
STAGE(LEFT) STAGE(RIGHT) VCA1(LEFT) VCA2(RIGHT) = THAT_Library; MOUSER_PART_NUMBER: 887-2181CS08-U
T1 = NUCLEO_parts; DESCRIPTION: PULSE ELECTRONICS - H1102NL - TRANSFORMER, 1:1, 1PORT, 100BASE-TX, SMT; HEIGHT: 5.97mm; MANUFACTURER_NAME: Pulse; MANUFACTURER_PART_NUMBER: H1102NL; MOUSER_PART_NUMBER: 673-H1102NL; MOUSER_PRICE-STOCK: https://www.mouser.com/Search/Refine.aspx?Keyword=673-H1102NL
X1 = NUCLEO_parts; MOUSER_PART_NUMBER: 649-61729-0010BLF
X2 = electro_mechanical
Y1 = NUCLEO_parts; DESCRIPTION: Crsytal unit for OA/AV/Mobile communications/Automotive; HEIGHT: mm; MANUFACTURER_NAME: NDK; MANUFACTURER_PART_NUMBER: NX3215SA-32.768K-STD-MUA-8; MOUSER_PART_NUMBER: 344-NX3215SA32768K8; MOUSER_PRICE-STOCK: https://www.mouser.com/Search/Refine.aspx?Keyword=344-NX3215SA32768K8
Y2 = NUCLEO_parts; DESCRIPTION: A small surface-mount type crystal unit, ideal for an engine control CPU clock; delivering the high reliability that is particularly demanded by automotive; HEIGHT: 1mm; MANUFACTURER_NAME: NDK; MANUFACTURER_PART_NUMBER: NX3225GD-8MHZ-STD-CRA-3; MOUSER_PART_NUMBER: 344-NX3225GD8MCRA3; MOUSER_PRICE-STOCK: https://www.mouser.com/Search/Refine.aspx?Keyword=344-NX3225GD8MCRA3
Y3 = NUCLEO_parts; DESCRIPTION: ABRACON - ABLS2-25.000MHZ-D4YF-T - CRYSTAL, 25MHZ, 18PF, HC-49US; HEIGHT: mm; MANUFACTURER_NAME: ABRACON; MANUFACTURER_PART_NUMBER: ABLS2-25.000MHZ-D4YF-T; MOUSER_PART_NUMBER: 815-ABLS2-25-D4YF-T; MOUSER_PRICE-STOCK: https://www.mouser.com/Search/Refine.aspx?Keyword=815-ABLS2-25-D4YF-T
Z1 = passive components; DESCRIPTION: Diodes Inc BZT52C2V0T-7 Zener Diode, 2.4V 5% 300 mW SMT 2-Pin SOD-523; MOUSER_PART_NUMBER: 621-BZT52C2V0T-7

## Nets
0,5V_DAC: IC7.3 IC14.3 IC15.1 IC15.2
1V_DAC: C22.1 C32.1 IC3.7 IC15.6 IC15.7
1V_DAC_UNBUFFERD: C19.1 C64.1 IC15.5 R61.2 R68.1
2V_DAC_REF: R67.1 R68.2 Z1.1
8MHZ_CRYSTAL_A: C70.1 IC10.23 Y2.1
8MHZ_CRYSTAL_B: C69.1 IC10.24 Y2.2
32.768KHZ_A: C66.1 IC10.8 Y1.1
32.768KHZ_B: C65.1 IC10.9 Y1.2
+3V3: C59.2 C73.1 C74.1 C75.1 C76.1 C77.1 C78.1 C79.1 C81.2 C82.2 C83.1 C84.1 C85.1 C86.2 C87.2 C90.2 C91.1 C92.2 C93.2 C119.2 DIGITAL_VOLT.1 FB5.1 FB6.1 IC6.1 IC6.9 IC6.19 IC10.6 IC10.17 IC10.30 IC10.39 IC10.52 IC10.62 IC10.72 IC10.84 IC10.95 IC10.108 IC10.121 IC10.131 IC10.143 IC10.144 R18.1 R20.1 R21.1 R22.1 R23.2 R99.2 T1.2 T1.7
+3V3_SIG: IC10.47
+5V: C99.1 C114.1 DIGITAL_VOLT.4 FB7.2 IC17.23 R35.2 R96.1 R100.2
+5V(ANALOG): C14.1 C24.1 C31.1 C33.1 C34.1 C36.1 C41.1 C42.1 C51.1 C52.1 C105.1 IC2.1 IC2.7 IC3.1 IC17.1 IC17.37 IC17.38 IC17.48 R67.2 U1.3
+5V_SIG: IC10.26
+12V_SIG: IC10.42
+15V_SIG: IC10.34
-15V_SIG: IC10.37
.: C123.2 IC14.1 R59.2 R72.2
...: C122.2 IC7.1 R71.2 R73.2
A_GND_TO_STAR: ANALOG_VOLT_IN.3 ANALOG_VOLT_IN.4 ANALOG_VOLT_OUT.3 ANALOG_VOLT_OUT.4 R16.1
AGND: +3V3_OK.1 +5V_OK.1 +15V_OK.1 -15V_OK.2 C1.2 C2.2 C3.2 C4.2 C5.2 C6.2 C7.2 C8.2 C11.2 C12.2 C13.2 C14.2 C19.2 C20.2 C21.2 C22.2 C23.2 C24.2 C25.2 C26.2 C27.2 C28.2 C29.2 C30.2 C31.2 C32.2 C33.2 C34.2 C35.2 C36.2 C40.1 C41.2 C42.2 C43.2 C44.1 C45.2 C46.2 C47.2 C48.2 C49.2 C50.2 C51.2 C52.2 C53.2 C54.2 C57.2 C58.2 C59.1 C60.2 C61.2 C62.2 C63.2 C64.2 C65.2 C66.2 C68.2 C69.2 C70.2 C71.2 C72.2 C73.2 C74.2 C75.2 C76.2 C77.2 C78.2 C79.2 C80.1 C81.1 C82.1 C83.2 C84.2 C85.2 C86.1 C87.1 C88.1 C89.1 C90.1 C91.2 C92.1 C93.1 C94.1 C95.2 C96.2 C97.2 C98.2 C100.1 C103.2 C104.2 C105.2 C114.2 C115.2 C116.2 C117.2 C118.2 C119.1 IC2.6 IC3.6 IC5.3 IC5.5 IC6.25 IC8.3 IC8.5 IC10.16 IC10.31 IC10.38 IC10.51 IC10.61 IC10.83 IC10.94 IC10.107 IC10.120 IC10.130 IC12.2 IC12.5 IC13.2 IC17.2 IC17.26 IC17.35 IC17.40 IC17.41 IC17.43 IC17.46 IC17.47 IC17.50 IC17.52 IC17.54 IC17.55 IC17.56 IC17.58 IC17.60 IC17.62 IC17.63 IC17.64 IN_LEFT.1 IN_RIGHT.1 OUT_LEFT.3 OUT_RIGHT.3 PROG..4 R1.2 R5.1 R6.1 R13.1 R14.2 R15.2 R16.2 R27.1 R46.1 R47.1 R58.1 R60.1 R69.2 R76.1 R77.2 R78.2 R83.1 R84.1 R85.1 R104.2 S1.1 S1.2 STAGE(LEFT).3 STAGE(LEFT).6 STAGE(RIGHT).3 STAGE(RIGHT).6 U1.2 U4.2 U6.1 U7.2 U8.1 VCA1(LEFT).3 VCA1(LEFT).6 VCA2(RIGHT).3 VCA2(RIGHT).6 X1.4 X2.3 Z1.2
BOOT0: IC10.138 R78.1
BOTTOM: R2.2
BUSY: IC10.88 IC17.14
CHASIS: X1.P$1 X1.P$2
CHASSIS: C15.1 C18.1 C106.2 C107.2 C108.2 C109.2 IN1(R/S).1 IN2(L/M).1 OUT1(R/S).1 OUT1(R/S).G OUT2(L/M).1 OUT2(L/M).G R1.1 R2.1 R91.1 X2.1
CS: IC10.123 IC17.13
CS_DAC1: IC10.134 R94.2
CS_DAC2: IC10.135 R95.2
CV_A_B: IC10.113 IC17.9 IC17.10
D_GND_TO_STAR: DIGITAL_VOLT.3 R15.1
DAC2_OUT1(OFFSET_VCA1): IC9.3 R74.2 R76.2
DAC2_OUT2(OFFSET_VCA2): IC9.5 R47.2 R75.2
DAC2_OUT3: IC3.4 R62.1
DAC2_OUT4: IC3.5 R70.1
DAC_OUT1: IC10.40 R57.1
DAC_OUT2: IC10.41 R55.1
DB0: IC10.141 IC17.16
DB1: IC10.142 IC17.17
DB2: IC10.1 IC17.18
DB3: IC10.2 IC17.19
DB4: IC10.3 IC17.20
DB5: IC10.4 IC17.21
DB6: IC10.5 IC17.22
DB7: IC10.58 IC17.24
DB8: IC10.59 IC17.25
DB9: IC10.60 IC17.27
DB10: IC10.63 IC17.28
DB11: IC10.64 IC17.29
DB12: IC10.65 IC17.30
DB13: IC10.66 IC17.31
DB14: IC10.67 IC17.32
DB15: IC10.68 IC17.33
DEBUG1: DEBUG1.P$1 IC10.21
DEBUG2: DEBUG2.P$1 IC10.115
DIN_DAC: IC10.29 R93.2 R103.2 TP04.P$1
DISPLAY_GND_TO_STAR: C39.2 C99.2 DISPLAY1.4 R69.1
E+_OUT_STAGE_LEFT: IC7.6 IC7.7 STAGE(LEFT).2 TP02.P$1
E+_OUT_STAGE_RIGHT: IC14.6 IC14.7 STAGE(RIGHT).2 TP01.P$1
EC+_VCA1(LFT): C120.2 IC9.1 R56.2 TP37.P$1 VCA1(LEFT).2
EC+_VCA2(RIGHT): C121.2 IC9.7 R54.2 TP36.P$1 VCA2(RIGHT).2
ETHERNET_CHASSIS: C101.2 J1.MP1 J1.MP2 R91.2
FRST: IC10.122 IC17.15
L: IC4.3 IN_LEFT.5 IN_LEFT.6 K5.Q1
L/M_IN(VCA1_IN): C102.1 IC17.49 K5.P1
L/M_OUT(OUT_STAGE_LEFT): IC1.3 INSERT_AFTER_GAIN.4 K6.Q1
L/M_OUT(OUT_STAGE_LEFT)_BEFORE: C38.2 IC5.1 IC17.59 INSERT_AFTER_GAIN.3 R28.2
L/M_OUT(VCA1_OUT): C55.2 IC8.1 IC17.53 INSERT_BEFORE_GAIN.3 R48.2
L/M_OUT+: C112.2 K3.S2 OUT_LEFT.8
L/M_OUT-: C113.2 K3.S1 OUT_LEFT.1
LD1: IC10.46 LD1.2
LD2: IC10.137 LD2.2
LD3: IC10.75 LD3.2
LED1: IC6.3 J1.10
LED2: IC6.2 J1.12 R85.2
M: K5.S1 U4.5 U4.6
M1: K6.S1 U7.5 U7.6
N$1: C9.1 IN_RIGHT.2 K1.S1
N$2: C10.2 IN_RIGHT.3 K1.S2
N$3: C9.2 C10.1 C15.2
N$4: IC17.34 R96.2
N$5: K6.P1 K7.S1 K8.Q1
N$6: LD1.1 R5.2
N$7: C17.2 IN_LEFT.3 K4.S2
N$8: K1.Q1 K2.Q1
N$9: C16.2 C17.1 C18.2
N$10: IC10.101 R19.1
N$11: K1.Q2 K2.Q2
N$12: LD2.1 R6.2
N$13: C16.1 IN_LEFT.2 K4.S1
N$14: LED1.1 R7.2
N$15: C71.1 IC10.71
N$16: LED3.1 R8.2
N$17: C72.1 IC10.106
N$18: IC4.1 IC4.2 U4.3 U6.3
N$19: K6.P2 K7.Q1 K8.S1
N$20: IC3.10 R102.1
N$21: IC6.7 R18.2 R24.2
N$22: IC6.8 R20.2 R25.2
N$23: IC6.11 R21.2 R26.2
N$24: IC6.10 R27.2
N$25: IC6.24 R77.1
N$26: LED8.1 R12.2
N$27: C88.2 C89.2 IC6.6
N$28: K3.Q1 K4.Q1
N$29: LED7.1 R11.2
N$30: LED6.1 R10.2
N$31: K3.Q2 K4.Q2
N$32: LED5.1 R9.2
N$33: IC16.1 IC16.2 U4.1 U6.2
N$34: LD3.1 R13.2
N$35: J1.1 T1.16
N$36: J1.2 T1.14
N$37: J1.3 T1.11
N$38: IC17.6 R14.1
N$39: IC3.8 R103.1
N$40: IC17.7 R35.1
N$41: C94.2 FB5.2 IC13.5 R79.2 R80.2 R81.2 R82.2
N$42: FB1.2 OUT2(L/M).3
N$43: IC1.6 IC1.7 U7.1 U8.2
N$44: FB4.2 OUT1(R/S).3
N$45: IC1.1 IC1.2 U7.3 U8.3
N$46: J1.6 T1.9
N$47: C107.1 D2.2 D3.1 FB2.1 K3.P2
N$48: C38.1 IC5.2 R28.1 STAGE(LEFT).8
N$49: LED2.1 R33.2
N$50: J1.11 R84.2
N$51: LED4.1 R34.2
N$52: J1.9 R83.2
N$53: C37.1 IC5.6 R30.1 STAGE(RIGHT).8
N$54: C43.1 R32.2 STAGE(RIGHT).5
N$55: R36.2 STAGE(LEFT).1
N$56: IC2.2 R38.2
N$57: IC2.3 R41.2
N$58: IC2.4 R44.2
N$59: IC2.5 R64.2
N$60: IC3.2 R74.1
N$61: IC3.3 R75.1
N$62: IC7.5 R46.2 R73.1
N$63: C120.1 IC9.2 R56.1 R57.2
N$64: C55.1 IC8.2 R48.1 VCA1(LEFT).8
N$65: R52.2 VCA1(LEFT).1
N$66: IC14.5 R58.2 R59.1
N$67: IC15.3 R60.2 R61.1
N$68: R37.2 STAGE(RIGHT).1
N$69: C40.2 IC6.4 Y3.1
N$70: C100.2 IC6.5 Y3.2
N$71: C102.2 R52.1
N$72: C122.1 IC7.2 R62.2 R71.1
N$73: C47.1 R31.2 STAGE(LEFT).5
N$74: C123.1 IC14.2 R70.2 R72.1
N$75: C56.1 IC8.6 R49.1 VCA2(RIGHT).8
N$76: -15V_OK.1 R97.2
N$77: C58.1 R51.2 VCA2(RIGHT).5
N$78: C67.2 R53.1
N$79: R53.2 VCA2(RIGHT).1
N$80: C61.1 R50.2 VCA1(LEFT).5
N$81: C121.1 IC9.6 R54.1 R55.2
N$82: +15V_OK.2 R98.1
N$83: +3V3_OK.2 R99.1
N$84: +5V_OK.2 R100.1
N$85: C109.1 D8.2 D10.1 FB3.1 K2.P2
N$86: J1.7 R29.2
N$87: J1.8 R88.2
N$88: R89.2 T1.12
N$89: R90.2 T1.15
N$90: C101.1 R29.1 R88.1 R89.1 R90.1
N$91: IC2.10 R92.1
N$92: C39.1 DISPLAY1.3 FB7.1
N$93: IC2.8 R93.1
N$94: IC2.9 R94.1
N$95: IC3.9 R95.1
N$96: INSERT_BEFORE_GAIN.2 R37.1
N$97: INSERT_BEFORE_GAIN.4 R36.1
N$98: C111.1 OUT_RIGHT.7
N$99: C110.1 OUT_RIGHT.2
N$100: C113.1 OUT_LEFT.2
N$101: C112.1 OUT_LEFT.7
N$102: C115.1 IC17.42
N$103: C116.1 IC17.44 IC17.45
N$104: C117.1 IC17.36
N$105: C118.1 IC17.39
N$106: C80.2 FB6.2 IC10.32 IC10.33
NEGATIVE_IN(L/M): IN2(L/M).3 K4.P1
NEGATIVE_IN(R/S): IN1(R/S).3 K1.P1
NEGATIVE_OUT(L/M): C106.1 D1.2 D4.1 FB1.1 K3.P1
NGATIVE_OUT(R/S): C108.1 D5.2 D9.1 FB4.1 K2.P1
NRST: C44.2 IC6.15 IC10.25 PROG..2 S1.3 S1.4
OS0: IC10.98 IC17.3
OS1: IC10.99 IC17.4
OS2: IC10.111 IC17.5
OUT1_DRIVER: K1.2 K2.2 R7.1 R33.1 U12.16
OUT2_DRIVER: K3.2 K4.2 R8.1 R34.1 U12.15
OUT3_DRIVER: K5.2 R9.1 U12.14
OUT4_DRIVER: K6.2 R10.1 U12.13
OUT5_DRIVER: K7.2 R11.1 U12.12
OUT6_DRIVER: K8.2 R12.1 U12.11
OUT_L/M: K8.P1 OUT_LEFT.4
OUT_R/S: K7.P1 OUT_RIGHT.4
PB12: IC10.73 TP05.P$1
PD10: IC10.79 TP08.P$1
PD11: IC10.80 TP09.P$1
PD12: IC10.81 TP10.P$1
POSITIVE_IN(L/M): IN2(L/M).2 K4.P2
POSITIVE_IN(R/S): IN1(R/S).2 K1.P2
POSITIVE_OUT(L/M): FB2.2 OUT2(L/M).2
POSITIVE_OUT(R/S): FB3.2 OUT1(R/S).2
R: IC16.3 IN_RIGHT.5 IN_RIGHT.6 K5.Q2
R/S_IN(VCA2_IN): C67.1 IC17.51 K5.P2
R/S_OUT(OUT_STAGE_RIGHT): IC1.5 INSERT_AFTER_GAIN.2 K6.Q2
R/S_OUT(OUT_STAGE_RIGHT)_BEFORE: C37.2 IC5.7 IC17.61 INSERT_AFTER_GAIN.1 R30.2
R/S_OUT(VCA2_OUT): C56.2 IC8.7 IC17.57 INSERT_BEFORE_GAIN.1 R49.2
R/S_OUT+: C111.2 K2.S2 OUT_RIGHT.8
R/S_OUT-: C110.2 K2.S1 OUT_RIGHT.1
RANGE: IC10.112 IC17.8
RD: IC10.116 IC17.12
RD_N: IC6.22 IC13.6 R82.1 T1.8
RD_P: IC6.23 IC13.1 R81.1 T1.6
RELAIS1: IC10.57 U12.1
RELAIS2: IC10.56 U12.2
RELAIS3: IC10.132 U12.3
RELAIS4: IC10.125 U12.4
RELAIS5: IC10.127 U12.5
RELAIS6: IC10.124 U12.6
RELAIS_TO_STAR_GND: R104.1 U12.8
RESET: IC10.87 IC17.11
RMII_CRS_DV: IC10.43 R26.1
RMII_MDC: IC6.13 IC10.27
RMII_MDIO: IC6.12 IC10.36 R22.2
RMII_REF_CLK: IC6.14 IC10.35 R23.1
RMII_RXD0: IC10.44 R25.1
RMII_RXD1: IC10.45 R24.1
RMII_TX_EN: IC6.16 IC10.126
RMII_TXD0: IC6.17 IC10.128
RMII_TXD1: IC6.18 IC10.74
S: K5.S2 U6.5 U6.6
S1: K6.S2 U8.5 U8.6
SCLK_DAC: IC10.69 R92.2 R102.2 TP03.P$1
SWCLK: IC10.109 PROG..1
SWDIO: IC10.105 PROG..3
SYM1: R38.1 R40.2 VCA1(LEFT).4
SYM2: R41.1 R43.2 VCA2(RIGHT).4
SYM3: R44.1 R63.2 STAGE(LEFT).4
SYM4: R64.1 R66.2 STAGE(RIGHT).4
TD_N: IC6.20 IC13.4 R80.1 T1.3
TD_P: IC6.21 IC13.3 R79.1 T1.1
USART1_RX: IC10.76
USART1_TX: IC10.136
USART3_RX: IC10.77 TP06.P$1
USART3_TX: IC10.78 TP07.P$1
USART6_RX: DISPLAY1.2 IC10.97
USART6_TX: DISPLAY1.1 IC10.96
USB_ID: IC10.102
USB_N: IC10.103 IC12.3 X1.2
USB_OVERCURRENT: IC10.92
USB_P: IC10.104 IC12.6 X1.3
USB_POWERSWITCHON: IC10.91
USB_SOF: IC10.100
USB_VBUS: IC12.1 R19.2 X1.1
V+: ANALOG_VOLT_IN.1 ANALOG_VOLT_OUT.1 C3.1 C4.1 C6.1 C8.1 C12.1 C21.1 C25.1 C27.1 C29.1 C30.1 C45.1 C46.1 C48.1 C50.1 C54.1 C60.1 C62.1 C63.1 C95.1 C97.1 C103.1 C104.1 D1.1 D2.1 D5.1 D8.1 IC1.8 IC4.8 IC5.8 IC7.8 IC8.8 IC9.8 IC14.8 IC15.8 IC16.8 IN_LEFT.7 IN_RIGHT.7 K1.1 K2.1 K3.1 K4.1 K5.1 K6.1 K7.1 K8.1 LED1.2 LED2.2 LED3.2 LED4.2 LED5.2 LED6.2 LED7.2 LED8.2 OUT_LEFT.6 OUT_RIGHT.6 R98.2 STAGE(LEFT).7 STAGE(RIGHT).7 U1.1 U4.7 U6.7 U7.7 U8.7 U12.9 VCA1(LEFT).7 VCA2(RIGHT).7
V-: ANALOG_VOLT_IN.2 ANALOG_VOLT_OUT.2 C1.1 C2.1 C5.1 C7.1 C11.1 C13.1 C20.1 C23.1 C26.1 C28.1 C35.1 C49.1 C53.1 C57.1 C68.1 C96.1 C98.1 D3.2 D4.2 D9.2 D10.2 IC1.4 IC4.4 IC5.4 IC7.4 IC8.4 IC9.4 IC14.4 IC15.4 IC16.4 IN_LEFT.4 IN_RIGHT.4 OUT_LEFT.5 OUT_RIGHT.5 R31.1 R32.1 R40.1 R43.1 R50.1 R51.1 R63.1 R66.1 R97.1 U4.4 U6.4 U7.4 U8.4

## Tracks (layer width: path | path; a pad name or v marks a point on that pad's centre or on a via)
0,5V_DAC  (via drill 0.35)
  Top(V+/+3V3) 0.2: 122.53,52.03 v122.5,52 | v122.3,44.4 124.39,44.4 IC14.3 | IC15.1 132.3,62.15 v132.3,61.2
  Top(V+/+3V3) 0.406: IC15.2 IC15.1 | IC7.3 122.53,52.03
  Bottom 0.2: v122.3,44.4 122.4,44.5 122.4,51.9 v122.5,52 123.53,53.02 123.53,59.23 125.5,61.2 v132.3,61.2
1V_DAC
  Top(V+/+3V3) 0.2: IC3.7 140.75,45.6 C22.1 138.22,44.45 137.4,43.63 137.4,43.3 C32.1
  Top(V+/+3V3) 0.305: IC15.7 127.97,63.47 132.15,59.28 132.15,52.75 132.87,52.03 135.82,52.03 136.36,51.49 136.36,47.84 138.6,45.6 IC3.7
  Top(V+/+3V3) 0.406: IC15.6 IC15.7
1V_DAC_UNBUFFERD
  Top(V+/+3V3) 0.406: IC15.5 125.4,66 124.75,66.65 C19.1 122.25,65.3 R68.1 121.35,65.15 C64.1 118.8,61.75 R61.2
2V_DAC_REF
  Top(V+/+3V3) 0.406: Z1.1 R67.1 117.85,65.3 R68.2
8MHZ_CRYSTAL_A
  Top(V+/+3V3) 0.2: C70.1 163.1,19.55 | 163.1,19.55 Y2.1 | IC10.23 164.25,22.95 163.1,21.8 163.1,19.55
8MHZ_CRYSTAL_B
  Top(V+/+3V3) 0.2: IC10.24 164.75,20.2 Y2.2 165.35,17.3 C69.1
32.768KHZ_A
  Top(V+/+3V3) 0.2: C66.1 156.8,19.55 Y1.1 IC10.8
32.768KHZ_B
  Top(V+/+3V3) 0.2: C65.1 159.3,19.55 Y1.2 157.25,21.6 IC10.9
+3V3
  Top(V+/+3V3) 0.2: C82.2 155,22.34 155.75,23.09 IC10.6 | C81.2 161.15,23.66 IC10.17 | C59.2 167.7,23.71 IC10.30 | C119.2 170.65,18.1 | IC10.39 175,26.75 C79.1 | C83.1 149.3,38.1 150.15,37.25 IC10.121 | IC6.9 189.15,25.1 C87.2 | IC10.131 149.1,32.25 C84.1 | C75.1 165.4,47.2 165.2,47 165.2,45.29 IC10.84
  pour Top(V+/+3V3): 143.4,70.3 143.4,-0.8 210.6,-0.8 210.6,0.5 210.6,0.51 210.5,7.9 210.5,70.3
+5V  (via drill 0.35)
  Top(V+/+3V3) 0.2: C114.1 144.95,12.1 144.3,12.1 v144.25,12.05 | R35.2 150.63,1.4 v151.03,1 | R100.2 156.95,5.35 v157,5.4
  Top(V+/+3V3) 0.254: IC17.23 144.9,12.05 C114.1
  Top(V+/+3V3) 0.508: v144.8,19.8 R96.1 | DIGITAL_VOLT.4 v192.79,4.29 v192.8,4.3 | C99.1 176.8,11.3 v178.7,11.3 179.07,10.93 FB7.2
  pour midBottom(V-/+5V): 143.4,-1.1 143.4,70.9 211.6,70.9 211.6,-1.1
+5V(ANALOG)  (via drill 1)
  Top(V+/+3V3) 0.2: IC3.1 135.1,47.5 C31.1 | IC2.7 139.95,35.55 140.98,35.55 141.7,34.83 C24.1 138.45,34.35 C34.1 | IC2.1 135.4,37.1 135.4,37.65 | 132.1,7 132.69,7 IC17.1 | 132.1,5.45 132.5,5.05
  Top(V+/+3V3) 0.254: 138.01,18.79 IC17.38 IC17.37 138.01,18.78 138.01,18.79 | 138.01,18.79 138.1,18.89 138.1,19.1
  Top(V+/+3V3) 0.305: IC17.48 132.75,17.43 132.47,17.15
  Top(V+/+3V3) 0.406: 135,37.65 135.4,37.65 136.65,37.65 137.2,37.1 C34.1 | R67.2 114.3,63.45 114.3,58.45 C105.1 | 133.3,16.32 133.3,16.3
  Top(V+/+3V3) 0.508: C52.1 138.1,19.85 138.1,19.1 | 138.01,18.78 138.01,16.51 137.8,16.3 133.3,16.3 133.3,9.74 132.1,8.54 132.1,7 132.1,5.45 | C51.1 130.92,18.7 132.47,17.15 133.3,16.32 | C31.1 135.1,48.25 C36.1 | C33.1 135,37.65 C14.1 | C41.1 132.5,5.05 C42.1
  Top(V+/+3V3) 1.016: 130.74,48.1 130.74,37.6 v130.79,37.65 C14.1 | 130.74,48.1 130.74,56.9 112.7,56.9 112.7,58.22 U1.3 C105.1 | C36.1 133.55,48.1 130.74,48.1 | v127.1,22.7 127.1,21.6 129.2,19.5 129.2,18.75 C51.1
  Bottom 1.016: v130.79,37.65 130.79,34.59 127.1,30.9 v127.1,22.7
.
  Top(V+/+3V3) 0.2: R59.2 117.65,46.3 121.8,46.3 | R72.2 125.85,46.3 121.8,46.3 | 121.8,46.3 121.8,42.9 122.91,41.8 IC14.1
  Top(V+/+3V3) 0.203: R72.2 C123.2
...
  Top(V+/+3V3) 0.2: R73.2 117.65,54.1 121.8,54.1 | R71.2 125.95,54.1 121.8,54.1 | IC7.1 122.7,49.49 121.8,50.4 121.8,54.1
  Top(V+/+3V3) 0.203: C122.2 R71.2
A_GND_TO_STAR
  Top(V+/+3V3) 0.508: R16.1 137.54,27.6 136.94,27 | 136.94,27 135.94,26 124.76,26 124.76,16.3 121.36,12.9 ANALOG_VOLT_IN.3 | 67.19,4.89 91.29,4.89 98.2,11.8 118.7,11.8 123.9,17 123.9,26.7 124.2,27 129,27 136.94,27
  Top(V+/+3V3) 1.016: ANALOG_VOLT_IN.3 121.36,7.28 120.09,6.01 ANALOG_VOLT_IN.4 | ANALOG_VOLT_OUT.3 68.46,6.16 67.19,4.89 ANALOG_VOLT_OUT.4
AGND  (via drill 0.35, 0.5)
  Top(V+/+3V3) 0.2: IC17.26 140.65,13.55 v140.6,13.5 | IC10.16 160.75,25.55 v160.8,25.6 | C81.1 v158.2,21.4 | C82.1 v155,18.7 | C66.2 v156.8,14.7 | C65.2 v159.3,14.7 | C70.2 v163.1,14.4 | C69.2 v165.3,14.4 165.7,14.8 C44.1 | v161.5,7.3 161,7.8 S1.1 | S1.2 164.6,7.8 v164.1,7.3 | C59.1 v167.7,18.4 | C80.1 169.5,19.8 v168.6,20.7 | IC10.31 168.25,25.65 v168.3,25.7 | v174.8,18.1 C119.1 | v197.6,16.1 197.5,16 196.35,16 C100.1 | v183.9,15.9 183.85,15.95 C40.1 | IC10.38 171.25,26.25 v171.2,26.2 | C83.2 v146.1,38.1 | +3V3_OK.1 152.2,1.4 v154.3,1.4 155.2,2.3 +5V_OK.1 | R27.1 190.69,22.94 v189.8,23.82 | C87.1 187.85,22.95 v187.8,22.9 | R85.1 v203.6,48.9 | R84.1 v203.6,46.7 | C92.1 v197.3,39.6 | C91.2 181.7,33.4 v181.5,33.6 | C86.1 v181.9,31.2 | C88.1 v181.9,29.4 | C89.1 182.95,27.7 v181.9,27.7 | C79.2 177.15,25.15 v177.1,25.1 | R77.2 v187.7,34.7 | R83.1 179.75,49.9 v178.6,49.9 | C76.2 177.8,44.3 v177.9,44.2 | C71.2 v178.2,40.7 | v177.9,38.4 176.85,38.4 C77.2 176.75,37.65 176.2,37.1 174.3,37.1 173.65,37.75 IC10.61 | v177.9,33.3 C78.2 176.75,32.05 176.7,32 174.5,32 173.75,32.75 IC10.51 | C93.1 v181.4,43.5 | v199.4,34 C94.1 | C90.1 195.65,30.6 v196.6,30.6 | C85.2 147.75,25.27 v147.6,25.12 | R78.2 147.35,29.75 v147.3,29.8 | C84.2 147.35,33.25 | 147.35,33.25 v147.3,33.3 | IC10.130 150.15,32.75 149.65,33.25 147.35,33.25 | PROG..4 v181.99,3.59 v182,3.6 | R13.1 165.05,5.25 v165.1,5.3 | R6.1 161.5,4.55 v161.5,5.4 | R5.1 158.45,5.35 v158.5,5.4 | C75.2 v165.4,50.6 | C74.2 160.7,49.45 v160.7,50.3 | IC12.2 IC12.5 v159.6,55.4 | IC10.94 160.25,43.8 v160.2,43.75 | IC10.83 165.75,43.65 v165.8,43.6 | IC10.107 153.75,43.85 v153.8,43.8 | C73.2 v152.1,50.9 | C72.2 v154.1,52.2 | C54.2 118,36.1 v117.95,36.15 118,36.2
  Top(V+/+3V3) 0.2: C22.2 141.45,43.2 C32.2 v139.5,43.2 | C31.2 v137.1,49.5 | C36.2 133.6,50.05 v133.6,51.1 | C14.2 v133.6,40.5 | C33.2 v137.2,38.9 | C24.2 140.85,32.65 C34.2 v139.6,33.1 | IC2.6 138.1,35 v137.9,34.8 | IC3.6 138,45.1 v137.8,44.9 | C95.2 v121.4,40.3 | R58.1 116.85,40.8 v115.8,40.8 | R46.1 116.55,48.2 v115.5,48.2 | C96.2 125.6,47.2 v125.7,47.1 | C49.2 v126,55 | C48.2 v121.2,47.9 | C105.2 v117.1,58.3 | C103.2 106.75,56.3 v107.7,56.3 | IC10.120 153.35,37.75 v153.4,37.7 | VCA2(RIGHT).3 70.64,19.23 v70.6,19.2 | C51.2 v126.4,18.7 | IC17.47 IC17.46 133.75,17.55 | v133.5,17.2 133.75,17.45 133.75,17.55 | IC17.41 IC17.40 136.5,18.29 136.5,18.12 | v136.5,17.2 136.5,18.12 | C43.2 v41.2,23.5 | v147.9,12.6 147.7,12.4 C114.2 | IC13.2 v194.5,36 | v189.8,28.4 189.93,28.07 IC6.25 | IC6.25 v189,29 | v189.8,29 189.4,28.7 IC6.25 | v137.1,17.2 137.1,17.52 136.5,18.12 | v134.7,17.2 135.25,17.75 IC17.43 135.25,17.87 135.9,17.22 v135.9,17.2 | 133.75,17.55 v134.1,17.2 | IC17.50 131.55,16.05 132,15.6 v132.5,15.6 | 131.6,15.05 131.65,15.05 132.1,14.6 v132.5,14.6 | IC17.54 131.75,14.05 v132.4,13.4 | 131.7,12.05 132.15,11.6 v132.5,11.6 | 131.7,11.05 132.35,10.4 v132.5,10.4 | IC17.63 131.49,9.55 v131.97,10.03 | C115.2 133.5,23.2 | 137.3,23.1 137.3,23.2 | R76.1 121.2,22.55 | 121.2,22.55 C57.2 | 121.2,22.55 v121.2,21.8 | R47.1 124.2,33.55 v124.2,34.1
  Top(V+/+3V3) 0.203: 133.25,8.2 133.25,8.35
  Top(V+/+3V3) 0.305: v131.3,19.6 131.1,19.8 C116.2 131.1,20.1 v130.6,19.6 | IC17.43 135.25,17.25 v135.3,17.2 | v138.7,17.1 138.86,17.1 139.25,17.49 IC17.35 | IC17.50 132.15,16.05 v132.2,16.1 | IC17.52 131.6,15.05 132.15,15.05 v132.2,15.1 | v132.2,14 132.15,14.05 IC17.54 IC17.55 IC17.56 | IC17.58 131.7,12.05 132.15,12.05 v132.2,12.1 | IC17.60 131.7,11.05 132.15,11.05 v132.2,11 | IC17.62 IC17.63 | IC17.63 IC17.64 | IC17.63 132.15,9.55 v132.2,9.5 | v133.1,8.6 133.25,8.45 133.25,8.2 IC17.2 | C115.2 133.5,23.4 v134,22.9 | v135.8,23.6 135.5,23.3 | C52.2 137.3,23.1 137.3,23.3 v137.6,23.6 | C117.2 139.1,23.2 | 139.1,23.2 139.1,23.7 v138.8,23.7 | C42.2 129.93,4.47 | 129.93,4.47 129.3,3.85 C41.2 | 129.93,4.47 129.5,4.9 v129.5,5 | R14.2 v134,1.4 | 133.5,23.2 v133.2,22.9 | C118.2 135.5,23.3 | 135.5,23.3 v135.2,23.6 | 137.3,23.2 v136.9,23.6 | 139.1,23.2 139,23.3 138.4,23.3 v138.3,23.4 | v133.5,9 133.5,8.6 133.25,8.35
  Top(V+/+3V3) 0.406: Z1.2 v117.5,61 | U1.2 108.6,67.5 v107.3,67.5 | R60.1 123.7,64.85 C19.2 | R60.1 122.75,62.6 C64.2 | C97.2 125.1,60.95 v125.1,62.4 125.1,62.9 124.45,63.55 R60.1 | C98.2 v129.2,68
  Top(V+/+3V3) 0.508: R104.2 140.65,29.5 v139.35,29.5 v139.35,28.8 | R16.2 v139.35,28.8 | R16.2 140.45,27.6 R1.2 | R15.2 139.45,25.1 | 139.45,25.1 139.35,25.1 v139.35,25.9 v139.35,26.6 | R69.2 140.85,23.7 139.45,25.1 | v139.35,28.8 v138.6,28.8 | R16.2 v139.35,26.6 | v139.35,26.6 v138.6,26.6 | OUT_RIGHT.3 14.56,41.84 v14.6,41.8 | OUT_LEFT.3 40.27,41.53 v40.3,41.5 | C13.2 13.9,34.65 | 13.9,34.65 C12.2 | 13.9,34.65 v13.9,33.6 | C11.2 v39.8,34.75 C8.2 | C2.2 63.55,41.55 v63.5,41.6 | IN_RIGHT.1 65.09,44.1 v64.7,44.5 | IN_LEFT.1 v90.81,44.2 v90.8,44.2 | C1.2 90.55,41.5 v89.2,41.5 | C3.2 v74.8,45.6 | C104.2 v100.7,46 | C63.2 v64.9,36.3 | C68.2 v74.2,34.1 | C4.2 v91.1,36.4 | C5.2 100.15,35.3 v101.3,35.3 | C21.2 101.35,26.25 v101.8,26.7 | U4.2 94.86,28.23 v94.9,28.2 | C23.2 v90.6,28.1 | C20.2 v64.8,28.6 | U6.1 v69,29.5 | C61.2 v93.1,22.5 | C62.2 v90.5,15.1 | IC8.3 87.14,12.13 87.65,12.65 C53.2 88.55,12.8 v89.5,12.8 | VCA1(LEFT).3 96.23,19.23 v96.2,19.2 | C58.2 v66.9,22.6 | IC8.5 v82.3,13.4 | C50.2 v76,9.2 | STAGE(LEFT).3 44.94,29.54 v44.9,29.5 | STAGE(LEFT).6 42.97,29.54 v43,29.5 | C46.2 v38.9,25.6 | STAGE(RIGHT).6 40.37,20.23 v39.9,20.7 | STAGE(RIGHT).3 45.03,20.23 v45,20.2 | C47.2 v41.2,32.8 | C7.2 v35.4,10.3 | C6.2 25.7,11.85 v25.7,12.8 | C28.2 v23.2,10.7 | U8.1 v22.6,9.6 | C29.2 v13.2,8 | C26.2 11.2,10.9 v11.22,10.88 11.21,10.87 U7.2 | C27.2 v1.2,8.1 | IC5.5 46.6,9.24 v46.6,8.4 | IC5.3 42.84,10.66 v42.9,10.6 | C35.2 37.95,8.25 v37.9,8.2 | C45.2 v38.9,16 | C30.2 v51.2,13.6 | C60.2 64.4,16.15 v64.4,15 | VCA2(RIGHT).6 68.67,19.23 v68.7,19.2 | C25.2 75.85,26.25 v75.9,26.3 | +15V_OK.1 v74.9,2.8 | -15V_OK.2 v85.3,1.8 | VCA1(LEFT).6 92.14,19.23 v91.6,18.7
  other vias: 189,28.4
  pour midTop(AGND): 132.7,-0.9 132.7,7.9 134.5,9.79 134.5,15.6 139,15.6 139,24.9 139.5,24.9 139.5,15 135.2,15 135.2,9.83 133.5,7.85 133.5,-0.9 210.1,-0.9 210.1,70.6 139.2,70.6 139.2,50 138.4,50 138.4,70.6 -0.9,70.6 -0.9,-0.9
  cutout midTop(AGND): 140.4,41.3 143.4,41.3 143.4,42 139.9,42 138.3,40.4 138.3,35.1 143.4,35.1 143.4,35.7 139.1,35.7 139.1,40
  cutout midTop(AGND): 142.5,45.2 142.5,42 143.4,42 143.4,45.2
  cutout midTop(AGND): 142.3,35.1 142.3,32 126,32 126,31.06 142.36,31.06 143.4,32.1 143.4,35.1
  cutout midTop(AGND): 139.52,24.9 126,24.9 126,24 139.52,24
AGND1
  cutout midTop(AGND): 139.1,45.9 139.1,52.2 138.5,52.2 138.5,45.2 143.3,45.2 143.3,45.9
BOOT0
  Top(V+/+3V3) 0.2: IC10.138 149.1,28.75 R78.1
BOTTOM  (via drill 0.35)
  Top(V+/+3V3) 0.2: R2.2 v17,2.6
  pour Bottom: -1.2,71.2 -1.2,-1.7 211.3,-1.7 211.3,71.2
BUSY  (via drill 0.35)
  Top(V+/+3V3) 0.254: IC17.14 139.25,5.65 v139.6,5.3 | v163.2,39.1 163.25,39.15 IC10.88
  midBottom(V-/+5V) 0.254: v139.6,5.3 139.8,5.1 148.2,5.1 148.88,5.78 148.88,29.88 158.1,39.1 v163.2,39.1
CHASIS
  Top(V+/+3V3) 1.016: X1.P$2 X1.P$1
CHASSIS  (via drill 0.35)  (8 unrouted)
  Top(V+/+3V3) 0.508: R91.1 199.5,39.9 200.8,38.6 200.8,17.7 196.5,13.4 156.65,13.4 v143.62,26.43 142.85,27.2 | v125.5,25.1 138,25.1 v138.6,25.7
  Top(V+/+3V3) 1.016: 45.15,57.3 OUT2(L/M).G 23.2,57.3 23.2,50.6 | 45.15,57.3 45.5,57.3 47.6,59.4 73.6,59.4 | 73.6,59.4 97.4,59.4 v97.4,57.6 97.4,51.9 94.85,49.34 C18.1 | C15.1 68.95,48.45 73.6,53.1 73.6,59.4 | C106.2 50.8,49.6 50.1,50.3 48.9,50.3 | 48.9,50.3 48.1,50.3 47.3,49.5 C107.2 | 48.9,50.3 48.9,53.55 45.15,57.3 | C108.2 24.9,49.6 23.9,50.6 23.2,50.6 | C109.2 21.5,49.8 22.3,50.6 23.2,50.6
  Bottom 0.508: v143.62,26.43 142.4,25.2 139.1,25.2 v138.6,25.7 | v125.5,25.1 125.5,20.9 124.7,20.1 105.88,20.1 102.6,23.38 102.6,53.4 98.4,57.6 v97.4,57.6
CS  (via drill 0.35)
  Top(V+/+3V3) 0.254: IC17.13 138.75,5.15 v139.1,4.8 | v155.8,35.6 155.8,35.7 155.25,36.25 IC10.123
  midBottom(V-/+5V) 0.254: v139.1,4.8 139.3,4.6 148.54,4.6 149.34,5.4 149.34,29.14 v155.8,35.6
CS_DAC1  (via drill 0.35)
  Top(V+/+3V3) 0.2: R94.2 143.7,38.5 v144.6,37.6 | IC10.134 145.25,30.75 v145.2,30.7
  Bottom 0.2: v144.6,37.6 144.6,31.3 v145.2,30.7
CS_DAC2  (via drill 0.35)
  Top(V+/+3V3) 0.2: IC10.135 151.24,30.27 145.02,30.27 144.78,30.52 144.78,30.88 145.1,31.2 v145.1,36.1 | v144.8,48.4 143.45,48.4 R95.2
  Bottom 0.2: v145.1,36.1 145.1,38 144.47,38.62 144.47,48.08 v144.8,48.4
CV_A_B  (via drill 0.35)
  Top(V+/+3V3) 0.254: IC17.10 IC17.9 136.74,4.56 v137.8,3.5 | v159.2,36.1 154.03,41.27 151.28,41.27 IC10.113
  midBottom(V-/+5V) 0.254: v137.8,3.5 138.2,3.1 149.4,3.1 150.7,4.4 150.7,27.6 v159.2,36.1
D_GND_TO_STAR
  Top(V+/+3V3) 0.508: DIGITAL_VOLT.3 189.56,12.6 156,12.6 143.53,25.08 143.55,25.1 R15.1
DAC2_OUT1(OFFSET_VCA1)  (via drill 0.35)
  Top(V+/+3V3) 0.2: IC9.3 120.94,25.14 120.33,25.14 v120.3,25.1 R76.2 | R74.2 132.7,45.15 v132.7,45
  Bottom 0.2: v132.7,45 132.7,44.9 119,31.2 119,26.4 v120.3,25.1
DAC2_OUT2(OFFSET_VCA2)  (via drill 0.35)
  Top(V+/+3V3) 0.2: IC9.5 v122.9,31.55 R47.2 | R75.2 132.5,43.15 v132.5,42.7
  Bottom 0.2: v132.5,42.7 131.6,42.7 122.9,34 v122.9,31.55
DAC2_OUT3  (via drill 0.35)
  Top(V+/+3V3) 0.2: IC3.4 137.2,45.6 v137.3,45.7 | v126.3,47.7 R62.1
  Bottom 0.2: v137.3,45.7 135.3,47.7 v126.3,47.7